# Altium PCB SlaveBoard_2020.PcbDoc (part 1 of 2)
Units mil, origin at the board's own origin, x right, y up, seen from the top; angles counter-clockwise.
Board outline 5905.51 x 3937.01 mil, 8 copper layers (Top Layer, SIG01, GND, SIG03, SIG04, PWR, SIG05, Bottom Layer), stack 60.424 mil thick; 102 components, 233 nets, 1118 pads, 683 vias.
Unrouted connection lines stored in the file: 111.
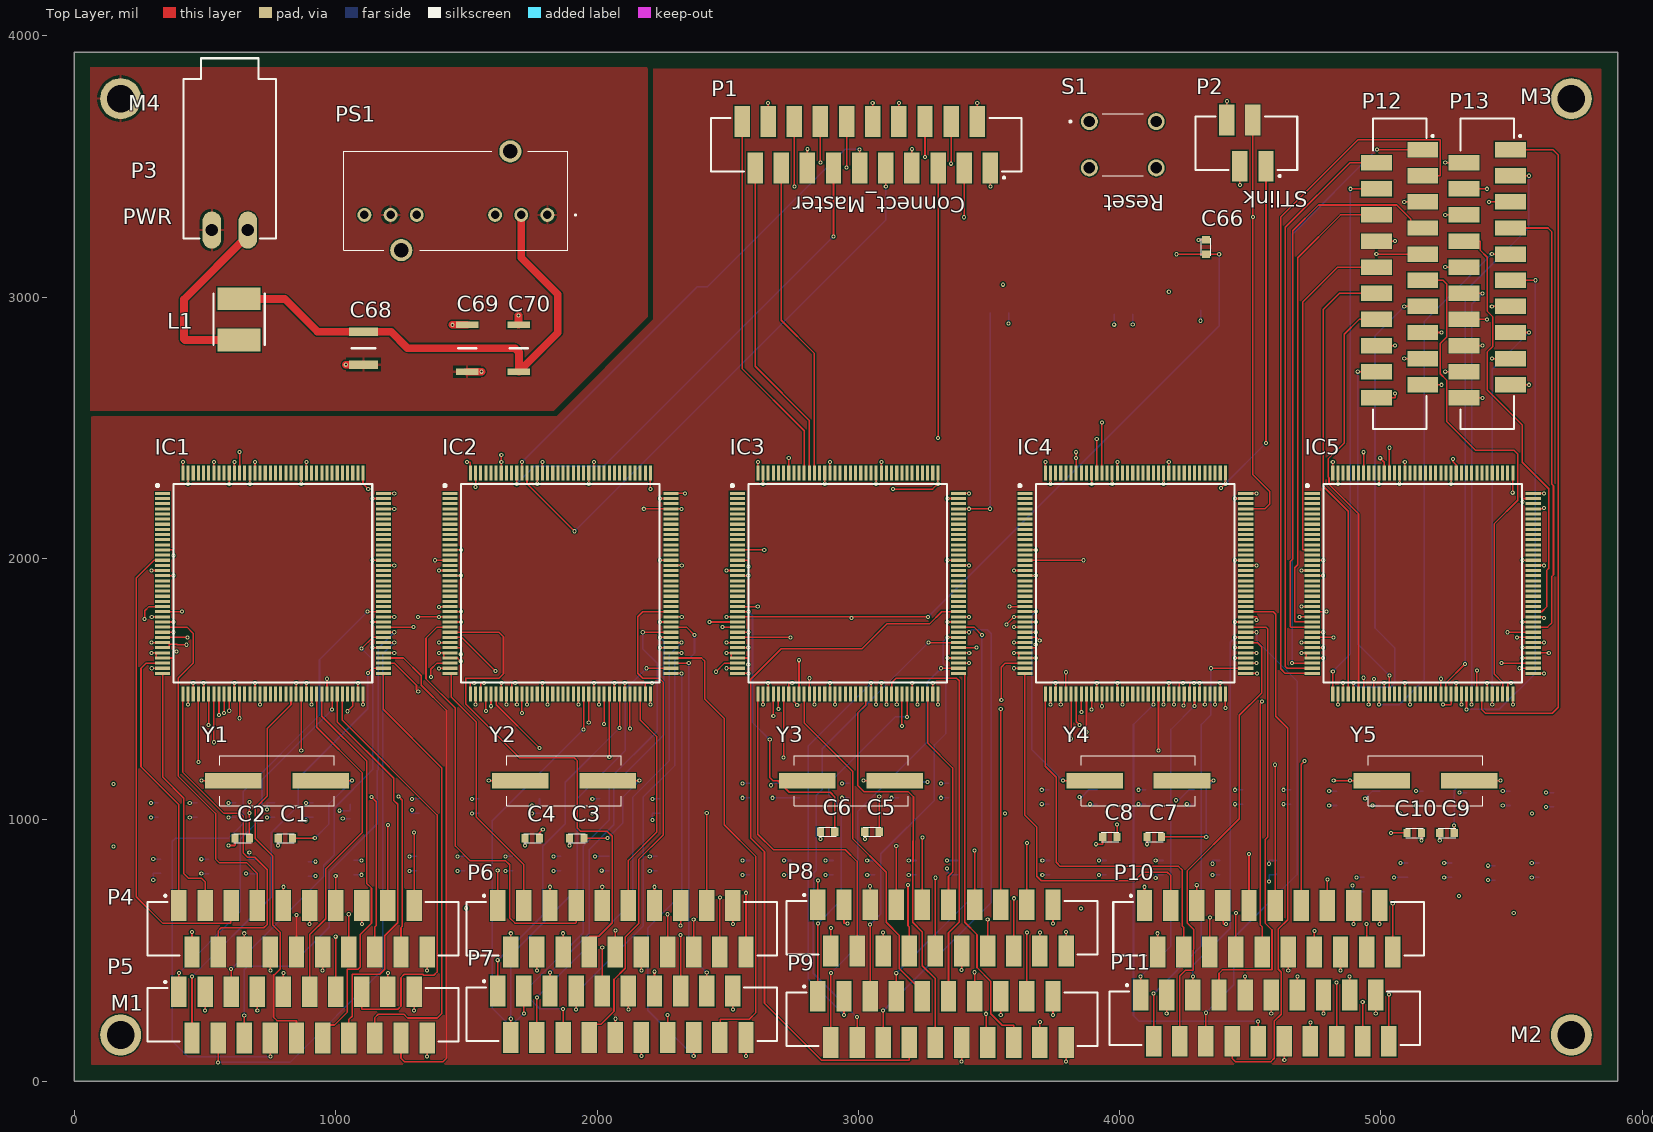
[diagram p0: Top Layer view]
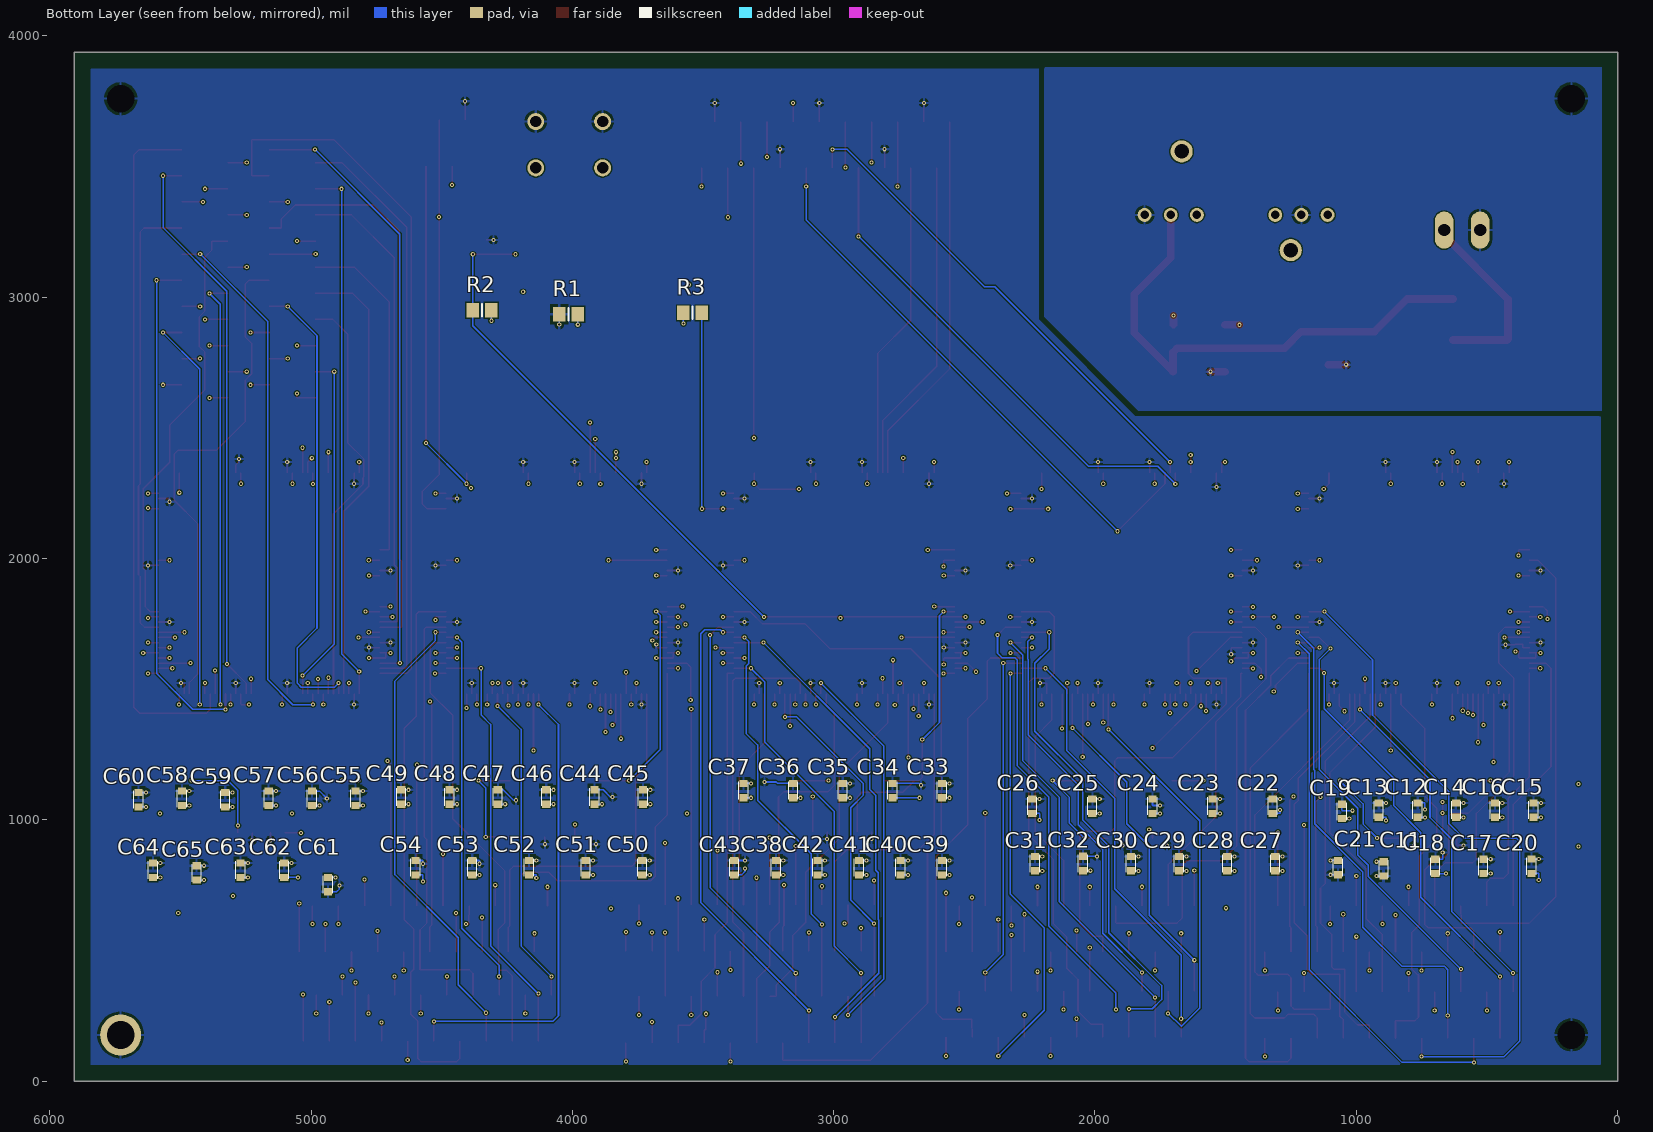
[diagram p1: Bottom Layer view, seen from below]
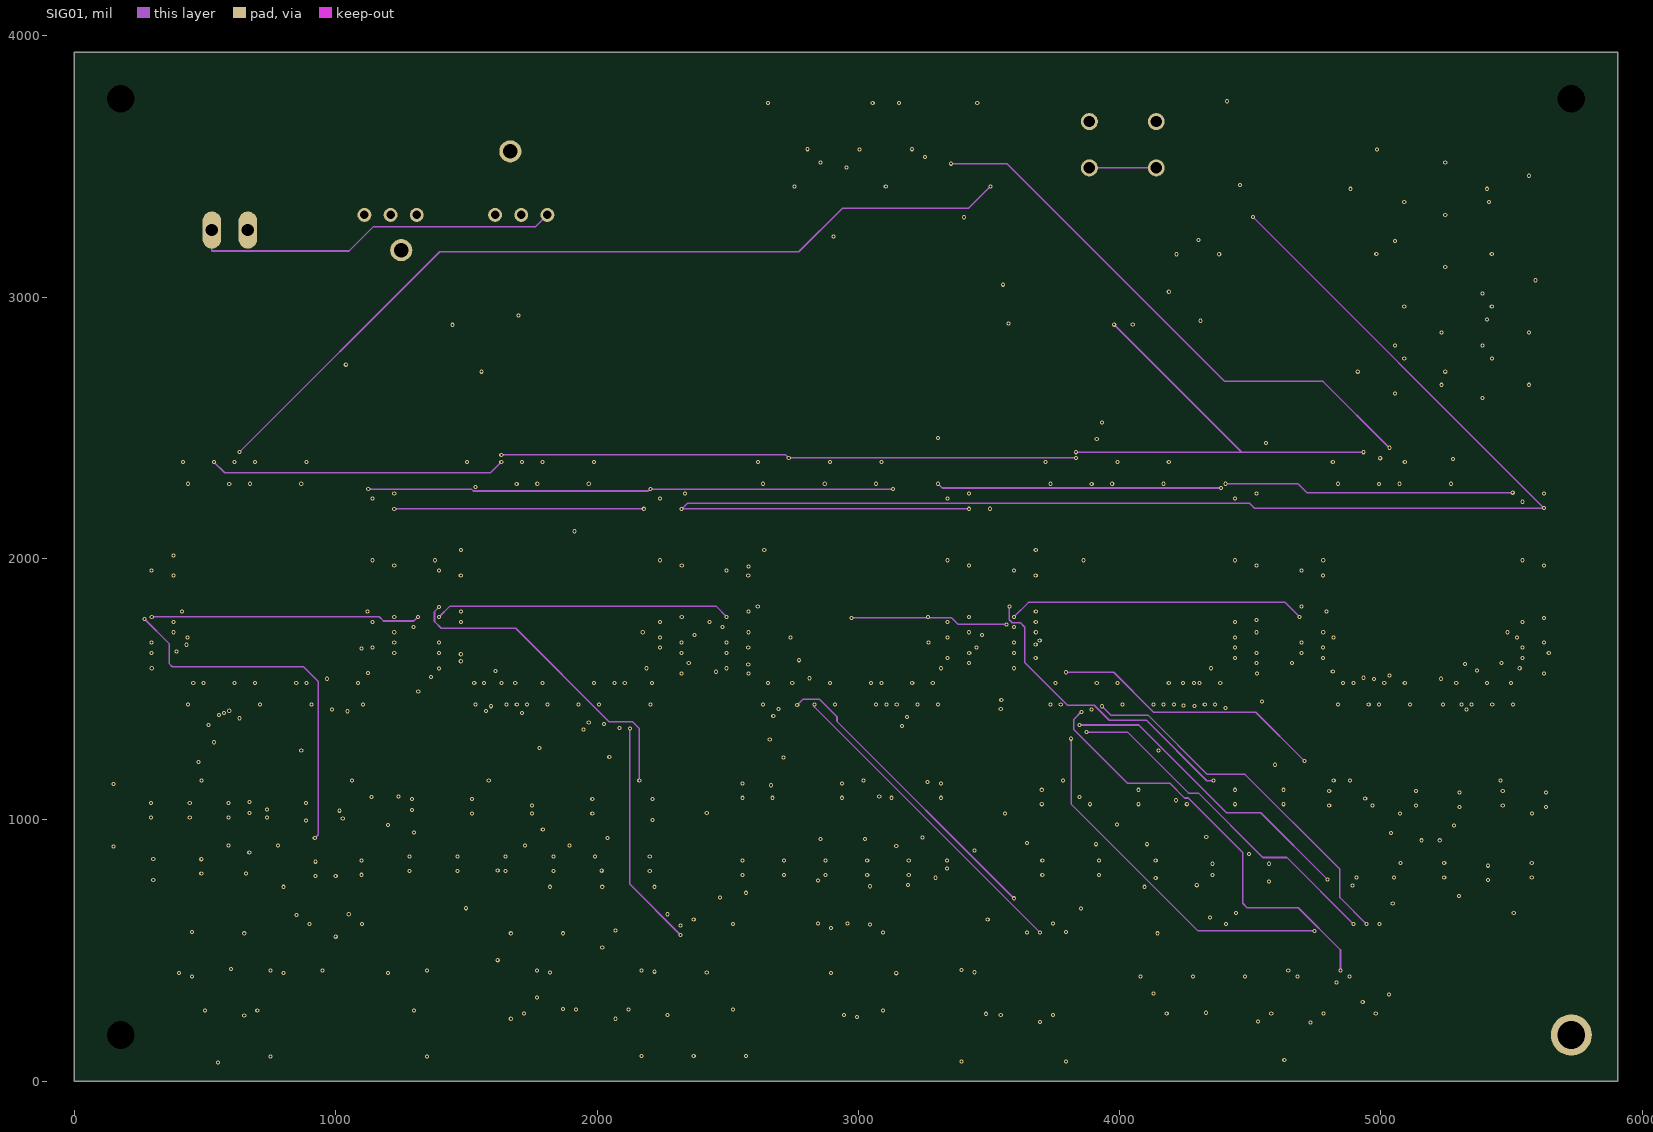
[diagram p2: SIG01]
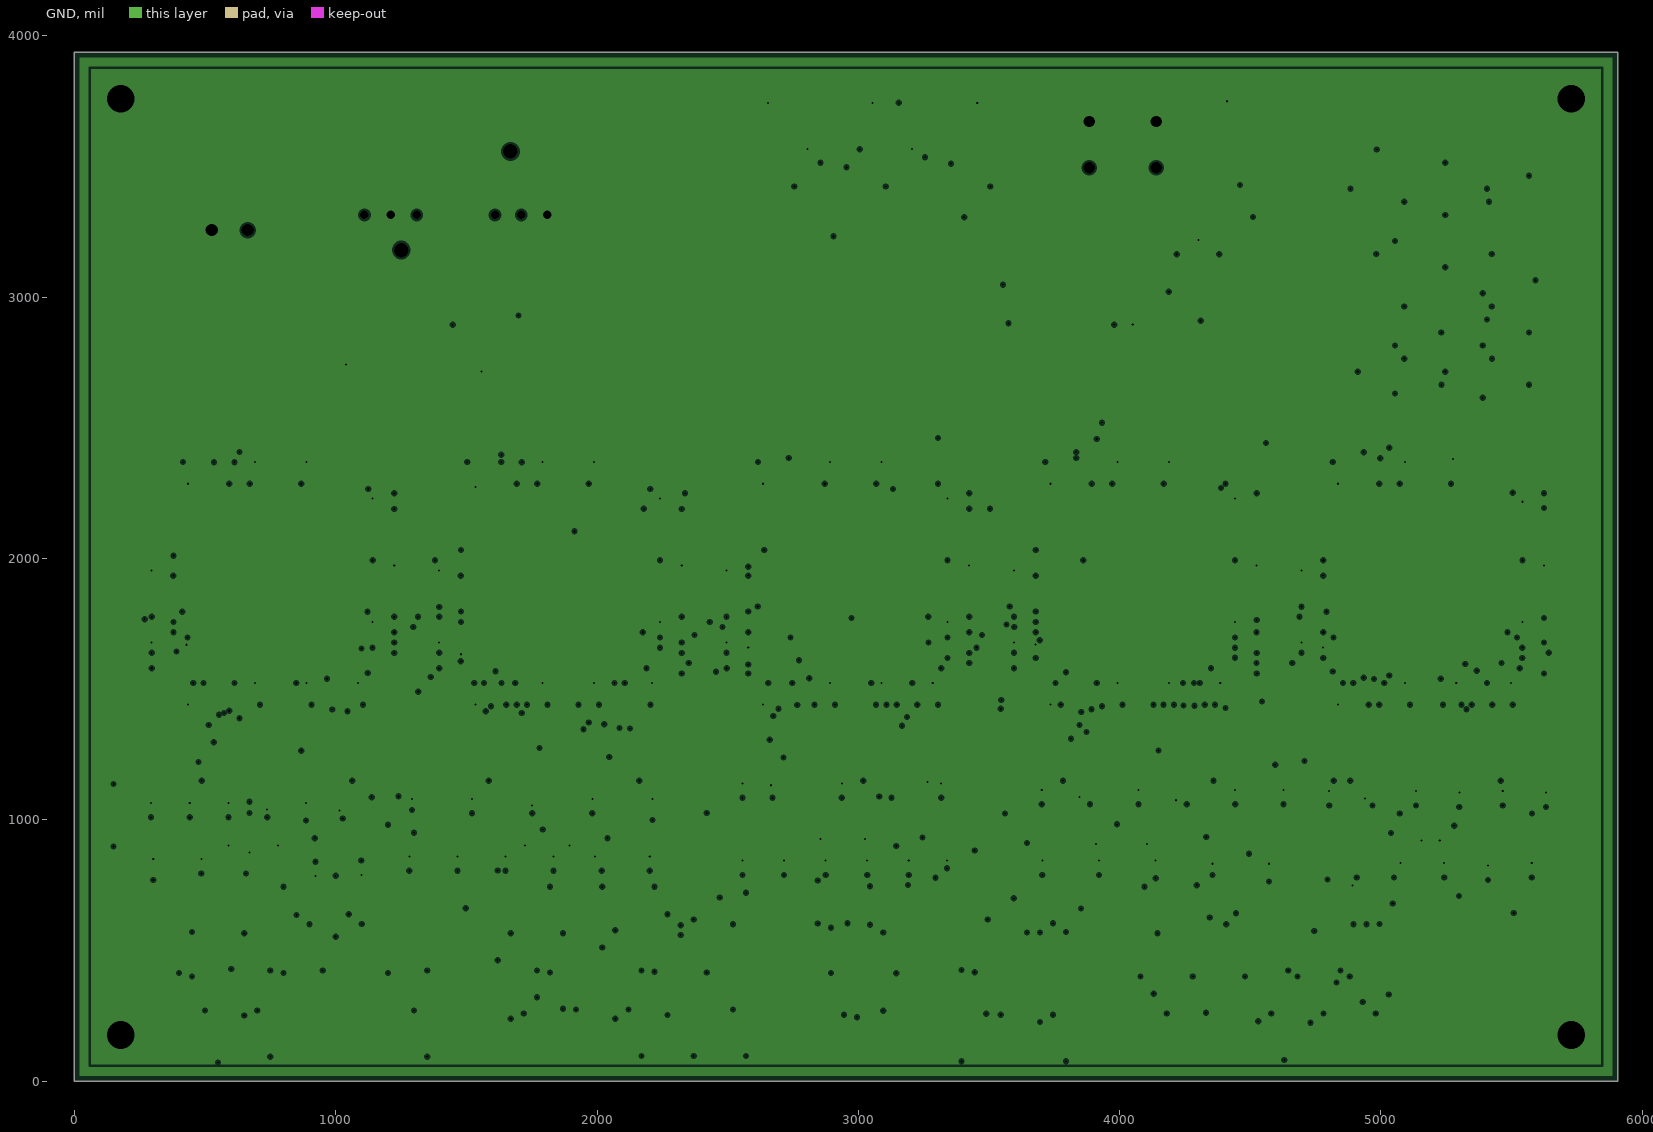
[diagram p3: GND, clearances drawn from the general rule]
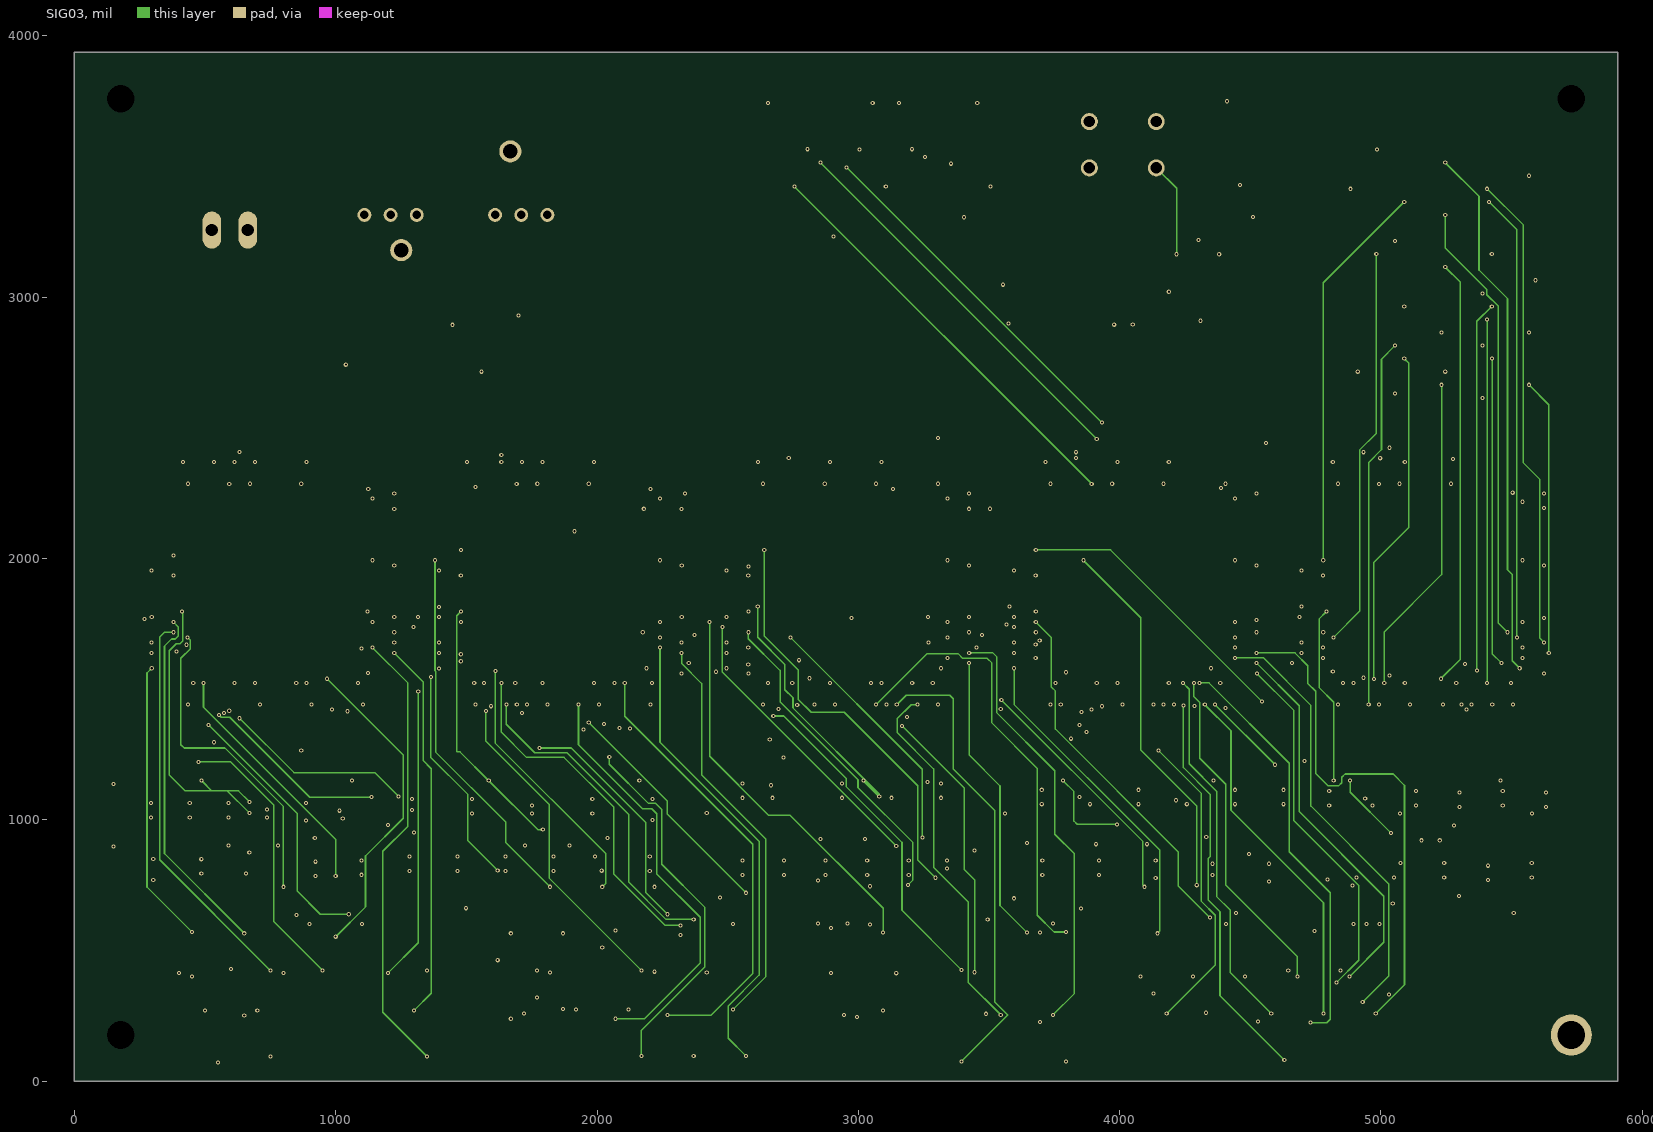
[diagram p4: SIG03]
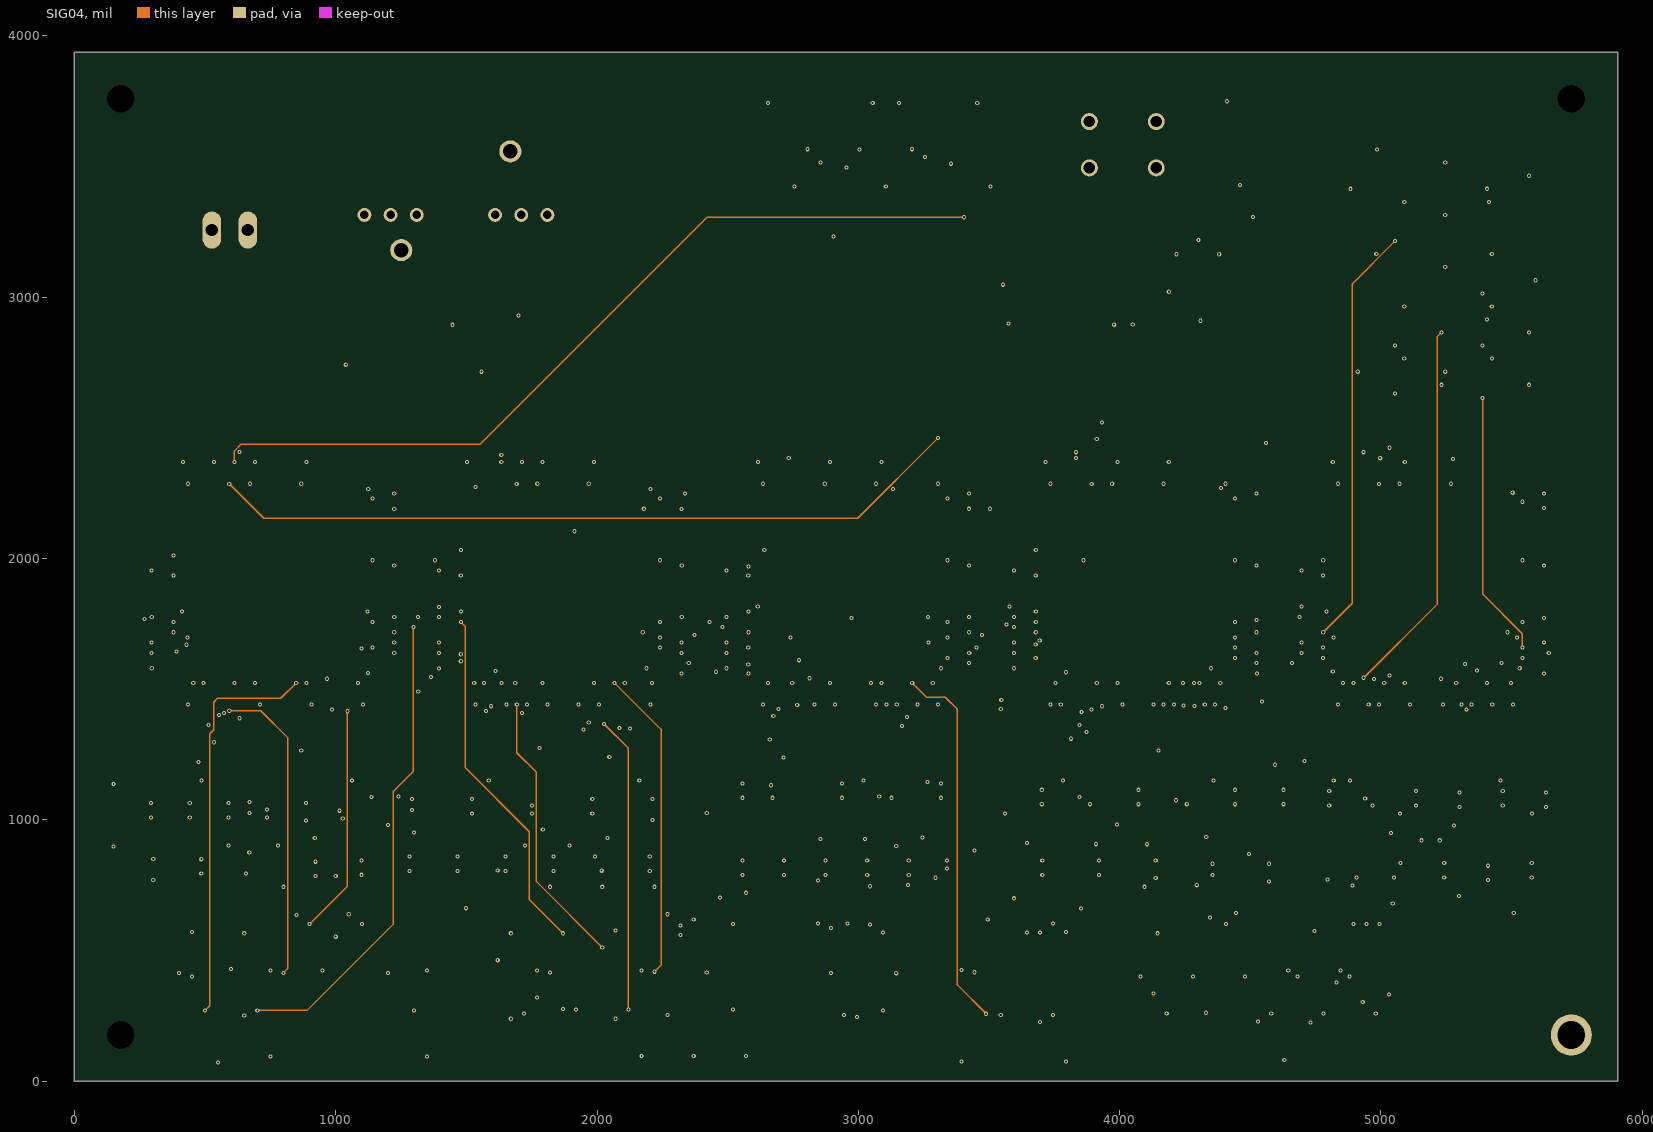
[diagram p5: SIG04]
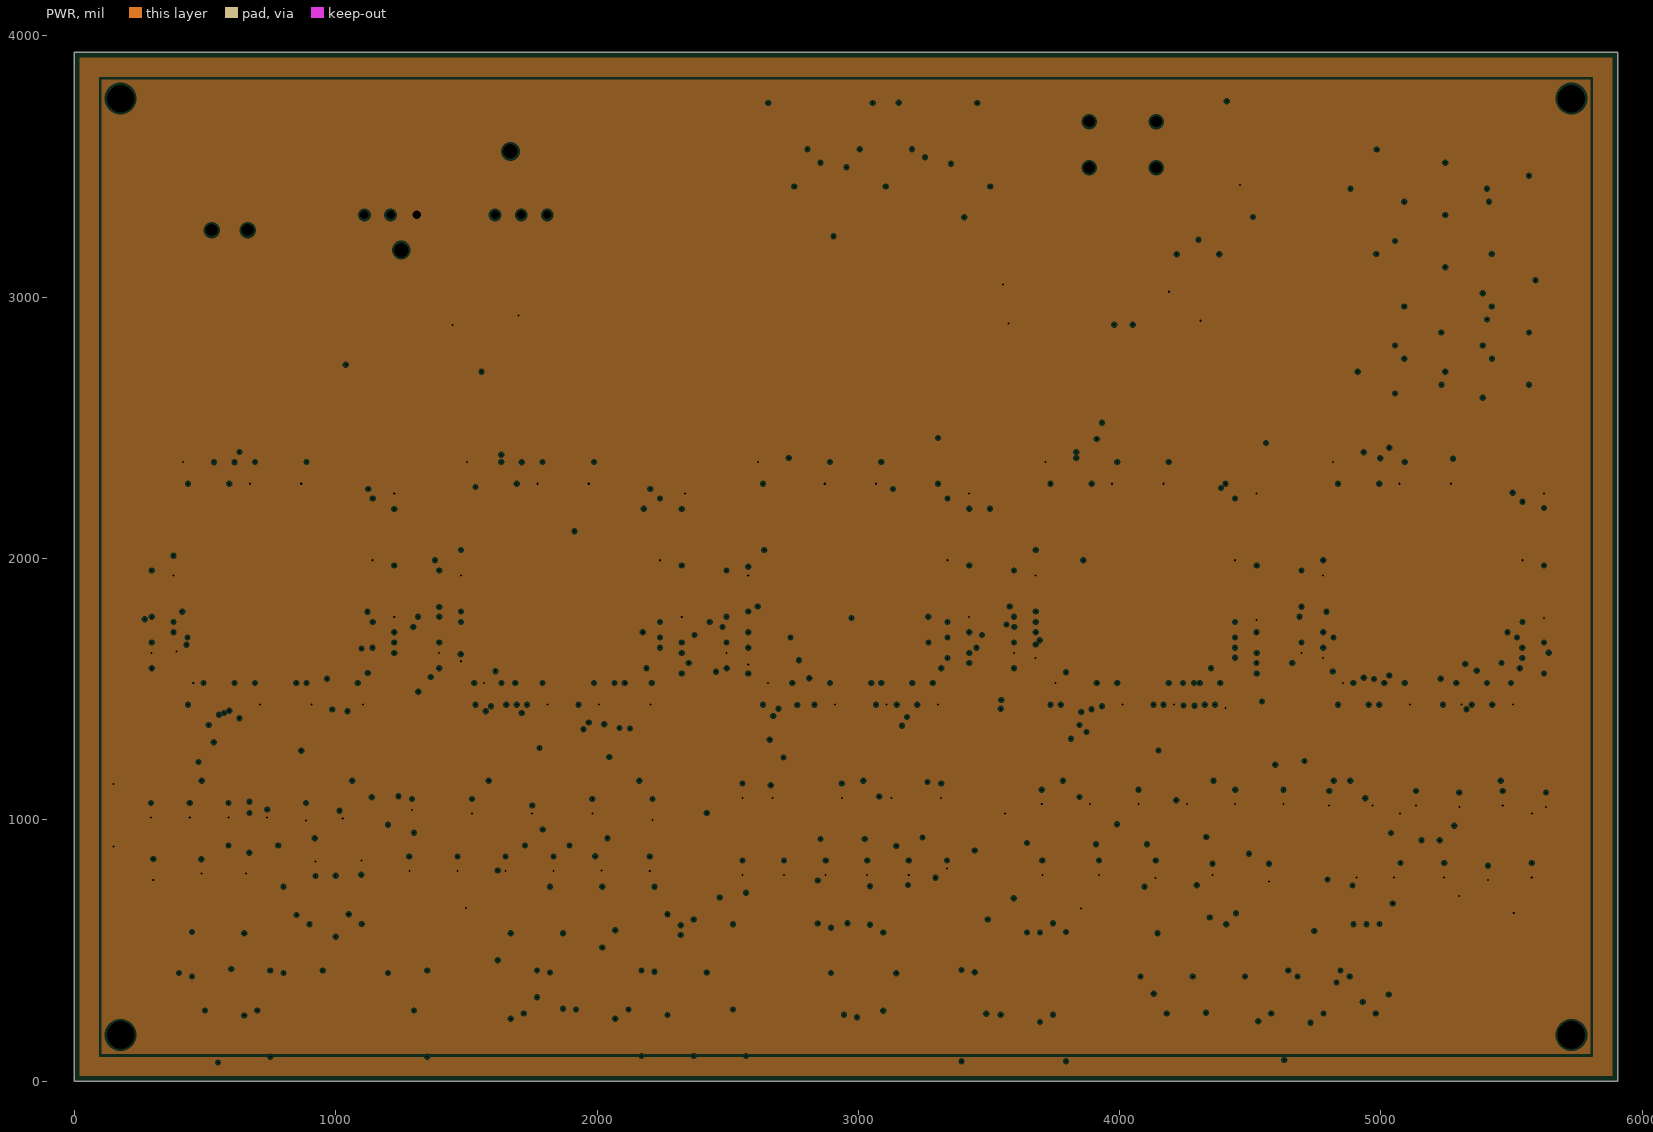
[diagram p6: PWR, clearances drawn from the general rule]
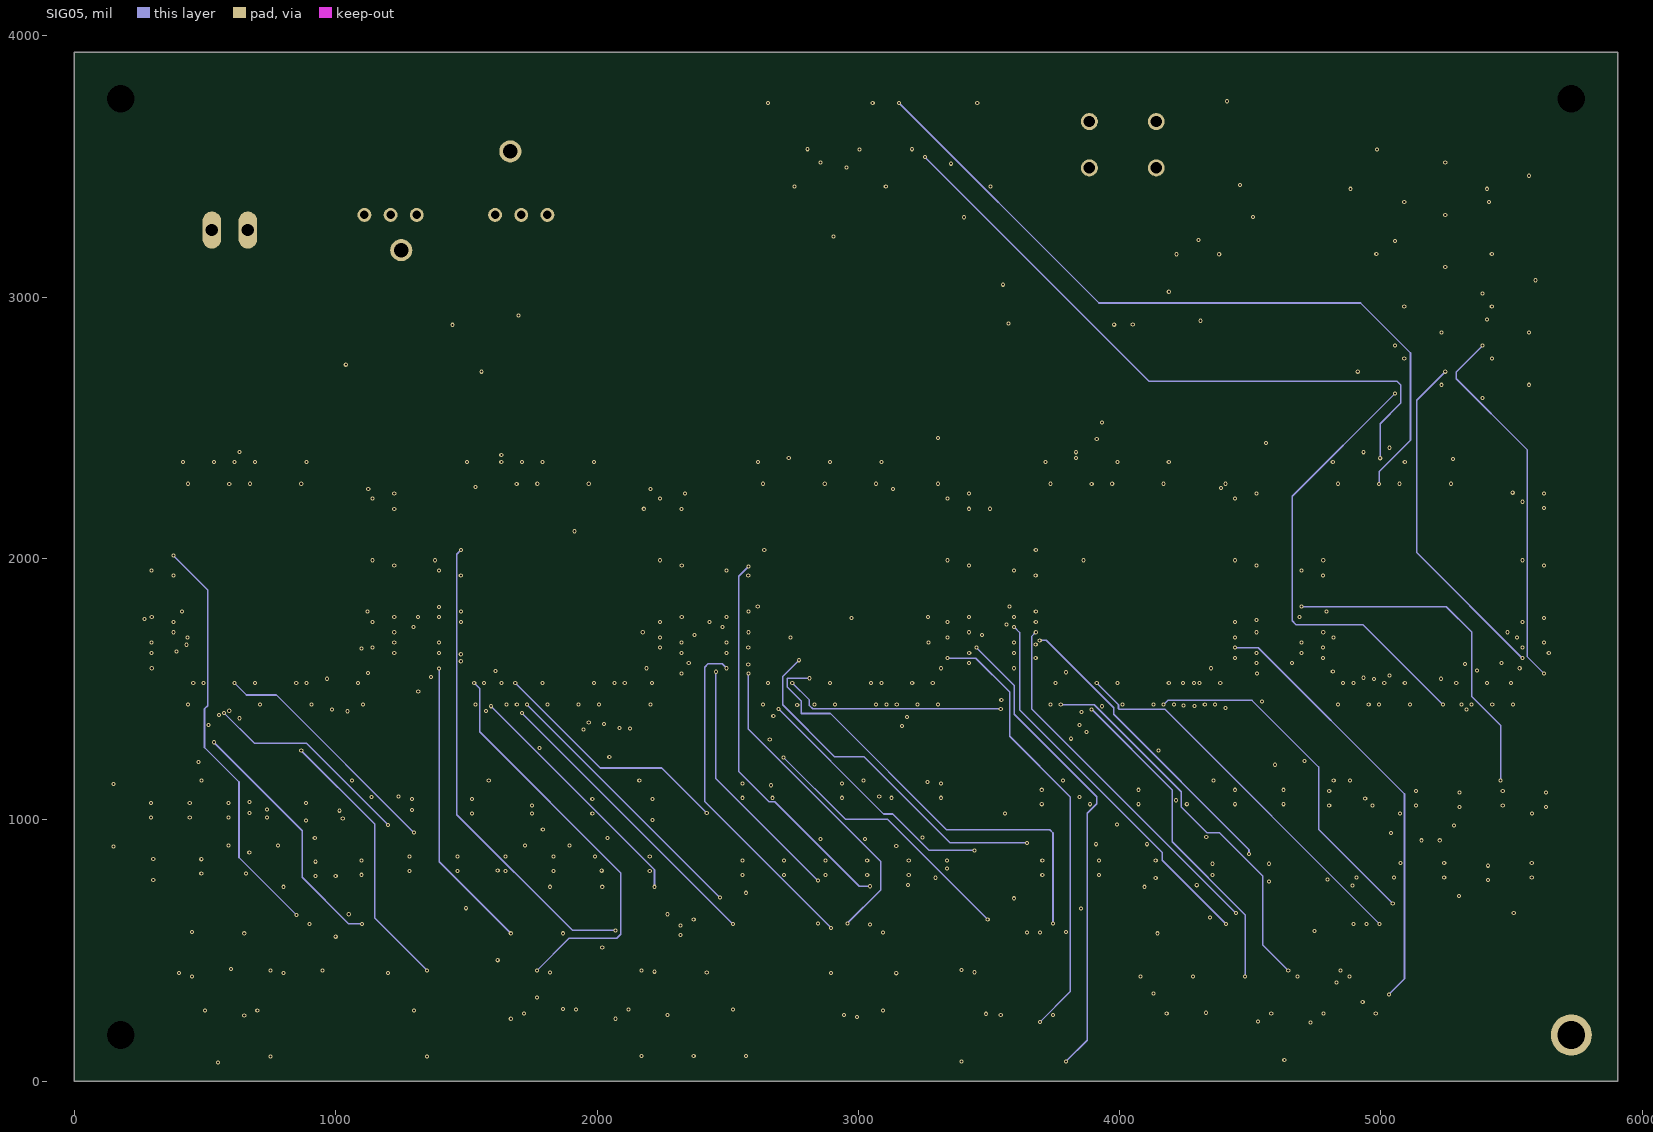
[diagram p7: SIG05]

## Layer stack, top to bottom
Top Solder: solder mask 1, SM-001, Dk 4
Top Layer: signal copper 1.378
Dielectric 1: prepreg 2.8, PP-006, Dk 4.1
Dielectric 2: prepreg 2.8, PP-006, Dk 4.1
SIG01: signal copper 1.378
Dielectric 3: core 9, Core-027, Dk 4.5
GND: plane copper 1.378, net GND
Dielectric 4: prepreg 2.8, PP-006, Dk 4.1
Dielectric 5: prepreg 2.8, PP-006, Dk 4.1
SIG03: signal copper 1.378
Dielectric 6: core 9, Core-027, Dk 4.5
SIG04: signal copper 1.378
Dielectric 7: prepreg 2.8, PP-006, Dk 4.1
Dielectric 8: prepreg 2.8, PP-006, Dk 4.1
PWR: plane copper 1.378, net 3.3V
Dielectric 9: core 9, Core-027, Dk 4.5
SIG05: signal copper 1.378
Dielectric 10: prepreg 2.8, PP-006, Dk 4.1
Dielectric 11: prepreg 2.8, PP-006, Dk 4.1
Bottom Layer: signal copper 1.378
Bottom Solder: solder mask 1, SM-001, Dk 4

## Board outline
0,0 0,3937.01 5905.51,3937.01 5905.51,0

## Design rules (kind name [scope] priority, off if disabled: settings)
Clearance [istrack>(InDifferentialPairClass('All Differential Pairs')) vs (IsTrack)] p1: gap=12 ignorepadtopadclearanceinfootprint=TRUE except(0: Arc-Hole Track-Hole SMDPad-Hole THPad-Hole Via-Hole Fill-Hole Poly-Hole Region-Hole Text-Hole)
Clearance All [All] p2: gap=4.5 ignorepadtopadclearanceinfootprint=TRUE except(0: Arc-Hole Track-Hole SMDPad-Hole THPad-Hole Via-Hole Fill-Hole Poly-Hole Region-Hole Text-Hole)
Clearance Via_Poly [IsVia vs inpoly] p3: gap=5 ignorepadtopadclearanceinfootprint=TRUE except(0: Arc-Hole Track-Hole SMDPad-Hole THPad-Hole Via-Hole Fill-Hole Poly-Hole Region-Hole Text-Hole)
Clearance Poly [Isvia vs (InPolygon)] p4: gap=10 ignorepadtopadclearanceinfootprint=TRUE except(0: Arc-Hole Track-Hole SMDPad-Hole THPad-Hole Via-Hole Fill-Hole Poly-Hole Region-Hole Text-Hole)
MinimumSolderMaskSliver [All] p1: minsoldermaskwidth=0
PlaneClearance [All] p1: clearance=8
PlaneConnect [All] p1: planeconnectstyle=Relief reliefexpansion=6 reliefentries=4 reliefconductorwidth=10 reliefairgap=8
PolygonConnect [All] p1: connectstyle=Relief reliefconductorwidth=10 reliefentries=4 polygonreliefangle="90 Angle" airgapwidth=10
PolygonConnect PolygonConnect_Via [IsVia] p2: connectstyle=Direct reliefconductorwidth=10 reliefentries=4 polygonreliefangle="90 Angle" airgapwidth=10
RoutingVias [All] p1: holewidth=7.87 width=15.75 viastyle="Through Hole" minholewidth=7.87 minwidth=15.75 maxholewidth=7.87 maxwidth=15.75
SilkToSilkClearance [All] p1: silktosilkclearance=0
SilkToSolderMaskClearance [IsPad] p1: minsilkscreentomaskgap=0 clearancetoexposedcopper=TRUE
SolderMaskExpansion [All] p1: expansion=4 istentingtop=FALSE
Width Diff_pair [(InDifferentialPairClass('100'))] p1: maxlimit=4.5 minlimit=4.5 preferedwidth=4.5
Width Width_1 [All] p2: maxlimit=60 minlimit=6 preferedwidth=6 minimp=50.000000 maximp=50.000000 favimp=50.000000
Width PWR [InNetClass('PWR')] p3: maxlimit=60 minlimit=10 preferedwidth=12
25 further rules are at their usual default settings.

## Components (designator, comment, footprint, x,y, rotation, side; value= is the part's Value field where it differs from the comment)
C1 "30pF" C0603 835,930 r180 top
C2 "30pF" C0603 670,930 r180 top
C3 "30pF" C0603 1950,930 r180 top
C4 "30pF" C0603 1780,930 r180 top
C5 "30pF" C0603 3080,955 r180 top
C6 "30pF" C0603 2910,955 r180 top
C7 "30pF" C0603 4160,935 r180 top
C8 "30pF" C0603 3990,935 r180 top
C9 "30pF" C0603 5280,950 r180 top
C10 "30pF" C0603 5100,950 r0 top
C11 "100nF" C0603 895,840 r270 bottom
C12 "100nF" C0603 765.91,1009.82 r90 bottom
C13 "100nF" C0603 914.03,1009.82 r90 bottom
C14 "100nF" C0603 617.79,1009.82 r90 bottom
C15 "100nF" C0603 321.56,1009.82 r90 bottom
C16 "100nF" C0603 469.68,1009.82 r90 bottom
C17 "100nF" C0603 513.75,794.46 r90 bottom
C18 "100nF" C0603 697.5,794.46 r90 bottom
C19 "100nF" C0603 1055,1005 r90 bottom
C20 "100nF" C0603 330,795 r90 bottom
C21 "100nF" C0603 1070,845 r270 bottom
C22 "100nF" C0603 1320,1025 r90 bottom
C23 "100nF" C0603 1550,1025 r90 bottom
C24 "100nF" C0603 1780,1025 r90 bottom
C25 "100nF" C0603 2010,1025 r90 bottom
C26 "100nF" C0603 2240,1025 r90 bottom
C27 "100nF" C0603 1310,805 r90 bottom
C28 "100nF" C0603 1494,805 r90 bottom
C29 "100nF" C0603 1678,805 r90 bottom
C30 "100nF" C0603 1862,805 r90 bottom
C31 "100nF" C0603 2230,805 r90 bottom
C32 "100nF" C0603 2046,805.47 r90 bottom
C33 "100nF" C0603 2585,1084.53 r90 bottom
C34 "100nF" C0603 2775,1084.53 r90 bottom
C35 "100nF" C0603 2965,1084.53 r90 bottom
C36 "100nF" C0603 3155,1084.53 r90 bottom
C37 "100nF" C0603 3345,1084.53 r90 bottom
C38 "100nF" C0603 3221,789.53 r90 bottom
C39 "100nF" C0603 2585,789.53 r90 bottom
C40 "100nF" C0603 2744,789.53 r90 bottom
C41 "100nF" C0603 2903,789.53 r90 bottom
C42 "100nF" C0603 3062,789.53 r90 bottom
C43 "100nF" C0603 3380,789.53 r90 bottom
C44 "100nF" C0603 3915,1060 r90 bottom
C45 "100nF" C0603 3730,1060 r90 bottom
C46 "100nF" C0603 4100,1060 r90 bottom
C47 "100nF" C0603 4285,1060 r90 bottom
C48 "100nF" C0603 4470,1060 r90 bottom
C49 "100nF" C0603 4655,1060 r90 bottom
C50 "100nF" C0603 3732,789.53 r90 bottom
C51 "100nF" C0603 3949,789.53 r90 bottom
C52 "100nF" C0603 4166,789.53 r90 bottom
C53 "100nF" C0603 4383,789.53 r90 bottom
C54 "100nF" C0603 4600,789.53 r90 bottom
C55 "100nF" C0603 4830,1055 r90 bottom
C56 "100nF" C0603 4996,1055 r90 bottom
C57 "100nF" C0603 5162,1055 r90 bottom
C58 "100nF" C0603 5494,1055 r90 bottom
C59 "100nF" C0603 5328,1049.53 r90 bottom
C60 "100nF" C0603 5660,1049.53 r90 bottom
C61 "100nF" C0603 4935,780 r270 bottom
C62 "100nF" C0603 5102.5,780 r90 bottom
C63 "100nF" C0603 5270,780 r90 bottom
C64 "100nF" C0603 5605,780 r90 bottom
C65 "100nF" C0603 5437.5,769.53 r90 bottom
C66 "100nF" C0603 4330,3164.53 r90 top
C68 "10uF" C1210 1106.56,2804.82 r90 top
C69 "1nF" C1808 1502.8,2804.82 r90 top
C70 "1nF" C1808 1700.91,2804.82 r90 top
IC1 "STM32F303ZET6" f303QFP50P2200X2200X160-144N 760,1905 r0 top
IC2 "STM32F303ZET6" f303QFP50P2200X2200X160-144N 1860,1905 r0 top
IC3 "STM32F303ZET6" f303QFP50P2200X2200X160-144N 2960,1905 r0 top
IC4 "STM32F303ZET6" f303QFP50P2200X2200X160-144N 4060,1905 r0 top
IC5 "STM32F303ZET6" f303QFP50P2200X2200X160-144N 5160,1905 r0 top
L1 "Inductor" L1_74404054220 630,2915 r90 top value=22uH
M1 "HOLE2R7-4" HOLE2R7-4#1 185,190 r0 top
M2 "HOLE2R7-4" HOLE2R7-4#2 5700,215 r0 top
M3 "HOLE2R7-4" HOLE2R7-4#3 5605,3625 r0 top
M4 "HOLE2R7-4" HOLE2R7-4#4 280,3600 r0 top
P1 "MHDR2X10" conn20pin 3030,3583.58 r0 top
P2 "MHDR1X4" Conn4pin 4485,3590 r0 top
P3 "MHDR1X2" ConnPWR 595,3570 r90 top
P4 "MHDR1X20" conn20pin 875,583.58 r180 top
P5 "MHDR1X20" conn20pin 875,253.58 r180 top
P6 "MHDR1X20" conn20pin 2095,583.58 r180 top
P7 "MHDR1X20" conn20pin 2095,256.42 r180 top
P8 "MHDR1X20" conn20pin 3320,586.42 r180 top
P9 "MHDR1X20" conn20pin 3320,236.42 r180 top
P10 "MHDR1X20" conn20pin 4570,583.58 r180 top
P11 "MHDR1X20" conn20pin 4555,241.42 r180 top
P12 "MHDR1X20" conn20pin 5071.42,3090 r90 top
P13 "MHDR1X20" conn20pin 5406.42,3090 r90 top
PS1 "TMR 6-2410WIR" TMR62410WIR 1810,3315 r180 top
R1 "10K" 6-0805_N 4014.57,2935 r180 bottom value=100K
R2 "10K" 6-0805_N 4345.43,2950 r180 bottom
R3 "10k" 6-0805_N 3539.57,2940 r180 bottom
S1 "B3F-1025" B3F1025 3884.09,3672.17 r180 top
Y1 "ATS08ASM-1E" ATS040SM1 775,1150 r180 top
Y2 "ATS08ASM-1E" ATS040SM1 1873.75,1150 r180 top
Y3 "ATS08ASM-1E" ATS040SM1 2972.5,1150 r180 top
Y4 "ATS08ASM-1E" ATS040SM1 4071.25,1150 r180 top
Y5 "ATS08ASM-1E" ATS040SM1 5170,1150 r180 top

## Footprints (in the part's own frame and the unit in brackets; to place one, negate y for a bottom-side part, rotate by r counter-clockwise, add the part's x,y. Pads: shape width x height; smd on the part's side, far side on the other; paste and mask are expansions set on the pad)
6-0805_N [mm] "Chip Resistor, Body 2.0x1.2mm, IPC Medium Density"
  rect 1.2x1.4 smd mask+0.102: 1(-0.9,0) 2(0.9,0)
  silkscreen extent 0,-0.6 0,0.6, body extent -1.07,-0.7 1.07,0.7, height 0.7
ATS040SM1 [mm]
  rect 5.5x1.5 smd mask+0.102: 1(-4.25,0) 2(4.25,0)
  silkscreen extent -5.55,-2.41 5.55,2.41, body extent -6.85,-2.41 6.85,2.41, height 4.4
B3F1025 [mm]
  round 1.65 hole 1.1 mask+0.102: 1(0,0) 2(-6.5,0) 3(0,4.5) 4(-6.5,4.5)
  silkscreen extent -5.25,-0.75 1.95,5.25, body extent -6.95,-0.75 0.45,5.25, height 5.3
C0603 [mm]
  rect 0.7x0.8 smd paste+0 mask+0.1: 1(0,0) 2(1.4,0)
  silkscreen extent -0.15,-0.45 1.55,0.45, body extent -0.15,-0.45 1.55,0.45, height 0.53
C1210 [mm]
  rect 0.81x2.82 smd: 1(-1.6,0) 2(1.6,0)
  silkscreen extent 0,-1.15 0,1.15, body extent -1.4,-1.22 1.4,1.22, height 1.98
C1808 [mm]
  rect 0.67x2.18 smd: 1(-2.28,0) 2(2.28,0)
  silkscreen extent 0,-0.9 0,0.9, body extent -2.27,-1 2.27,1, height 1.3
Conn4pin [mm]
  rect 1.5x3 smd: 1(1.905,-2.25) 2(0.635,2.25) 3(-0.635,-2.25) 4(-1.905,2.25)
  silkscreen extent -4.94,-3.3 4.94,2.6
conn20pin [mm]
  rect 1.5x3 smd: 1(12.065,-2.25) 2(10.795,2.25) 3(9.525,-2.25) 4(8.255,2.25) 5(6.985,-2.25) 6(5.715,2.25) 7(4.445,-2.25) 8(3.175,2.25) 9(1.905,-2.25) 10(0.635,2.25) 11(-0.635,-2.25) 12(-1.905,2.25) 13(-3.175,-2.25) 14(-4.445,2.25) 15(-5.715,-2.25) 16(-6.985,2.25) 17(-8.255,-2.25) 18(-9.525,2.25) 19(-10.795,-2.25) 20(-12.065,2.25)
  silkscreen extent -15.1,-3.3 15.1,2.6
ConnPWR [mm]
  oval 3.6x1.8 hole 1.2: 1(-7.95,-1.75) 2(-7.95,1.75)
  silkscreen extent -8.75,-4.5 8.75,4.5
f303QFP50P2200X2200X160-144N [mm]
  rect 1.475x0.3 smd mask+0.102: 1(-10.738,8.75) 2(-10.738,8.25) 3(-10.738,7.75) 4(-10.738,7.25) 5(-10.738,6.75) 6(-10.738,6.25) 7(-10.738,5.75) 8(-10.738,5.25) 9(-10.738,4.75) 10(-10.738,4.25) 11(-10.738,3.75) 12(-10.738,3.25) 13(-10.738,2.75) 14(-10.738,2.25) 15(-10.738,1.75) 16(-10.738,1.25) 17(-10.738,0.75) 18(-10.738,0.25) 19(-10.738,-0.25) 20(-10.738,-0.75) 21(-10.738,-1.25) 22(-10.738,-1.75) 23(-10.738,-2.25) 24(-10.738,-2.75) 25(-10.738,-3.25) 26(-10.738,-3.75) 27(-10.738,-4.25) 28(-10.738,-4.75) 29(-10.738,-5.25) 30(-10.738,-5.75) 31(-10.738,-6.25) 32(-10.738,-6.75) 33(-10.738,-7.25) 34(-10.738,-7.75) 35(-10.738,-8.25) 36(-10.738,-8.75) 73(10.738,-8.75) 74(10.738,-8.25) 75(10.738,-7.75) 76(10.738,-7.25) 77(10.738,-6.75) 78(10.738,-6.25) 79(10.738,-5.75) 80(10.738,-5.25) 81(10.738,-4.75) 82(10.738,-4.25) 83(10.738,-3.75) 84(10.738,-3.25) 85(10.738,-2.75) 86(10.738,-2.25) 87(10.738,-1.75) 88(10.738,-1.25) 89(10.738,-0.75) 90(10.738,-0.25) 91(10.738,0.25) 92(10.738,0.75) 93(10.738,1.25) 94(10.738,1.75) 95(10.738,2.25) 96(10.738,2.75) 97(10.738,3.25) 98(10.738,3.75) 99(10.738,4.25) 100(10.738,4.75) 101(10.738,5.25) 102(10.738,5.75) 103(10.738,6.25) 104(10.738,6.75) 105(10.738,7.25) 106(10.738,7.75) 107(10.738,8.25) 108(10.738,8.75)
  rect 0.3x1.475 smd mask+0.102: 37(-8.75,-10.738) 38(-8.25,-10.738) 39(-7.75,-10.738) 40(-7.25,-10.738) 41(-6.75,-10.738) 42(-6.25,-10.738) 43(-5.75,-10.738) 44(-5.25,-10.738) 45(-4.75,-10.738) 46(-4.25,-10.738) 47(-3.75,-10.738) 48(-3.25,-10.738) 49(-2.75,-10.738) 50(-2.25,-10.738) 51(-1.75,-10.738) 52(-1.25,-10.738) 53(-0.75,-10.738) 54(-0.25,-10.738) 55(0.25,-10.738) 56(0.75,-10.738) 57(1.25,-10.738) 58(1.75,-10.738) 59(2.25,-10.738) 60(2.75,-10.738) 61(3.25,-10.738) 62(3.75,-10.738) 63(4.25,-10.738) 64(4.75,-10.738) 65(5.25,-10.738) 66(5.75,-10.738) 67(6.25,-10.738) 68(6.75,-10.738) 69(7.25,-10.738) 70(7.75,-10.738) 71(8.25,-10.738) 72(8.75,-10.738) 109(8.75,10.738) 110(8.25,10.738) 111(7.75,10.738) 112(7.25,10.738) 113(6.75,10.738) 114(6.25,10.738) 115(5.75,10.738) 116(5.25,10.738) 117(4.75,10.738) 118(4.25,10.738) 119(3.75,10.738) 120(3.25,10.738) 121(2.75,10.738) 122(2.25,10.738) 123(1.75,10.738) 124(1.25,10.738) 125(0.75,10.738) 126(0.25,10.738) 127(-0.25,10.738) 128(-0.75,10.738) 129(-1.25,10.738) 130(-1.75,10.738) 131(-2.25,10.738) 132(-2.75,10.738) 133(-3.25,10.738) 134(-3.75,10.738) 135(-4.25,10.738) 136(-4.75,10.738) 137(-5.25,10.738) 138(-5.75,10.738) 139(-6.25,10.738) 140(-6.75,10.738) 141(-7.25,10.738) 142(-7.75,10.738) 143(-8.25,10.738) 144(-8.75,10.738)
  silkscreen extent -11.35,-9.65 9.65,9.65, body extent -11,-11 11,11, height 1.6
HOLE2R7-4#1 [mm] "HOLE2R7-4"
  round 4 / inner round 1.524 / far side round 1.524 hole 2.7 mask+0.102: 1(-0.199,-0.326)
HOLE2R7-4#2 [mm] "HOLE2R7-4"
  round 4 hole 2.7 mask+0.102: 1(0.72,-0.961)
HOLE2R7-4#3 [mm] "HOLE2R7-4"
  round 4 / inner round 1.524 / far side round 1.524 hole 2.7 mask+0.102: 1(3.133,3.425)
HOLE2R7-4#4 [mm] "HOLE2R7-4"
  round 4 / inner round 1.524 / far side round 1.524 hole 2.7 mask+0.102: 1(-2.612,4.06)
L1_74404054220 [mm]
  rect 2.2x4.2 smd: 1(-2,0) 2(2,0)
  silkscreen extent -2.5,-2.5 2.5,2.5, body extent -2.5,-2.5 2.5,2.5, height 4
TMR62410WIR [mm]
  round 1.349 hole 0.83 mask+0.102: 1(0,0) 2(2.54,0) 3(5.08,0) 6(12.7,0) 7(15.24,0) 8(17.78,0)
  round 2.145 hole 1.43 mask+0.102: 9(3.6,-6.175) 10(14.2,3.425)
  silkscreen extent -2.8,-6.17 19.8,3.42, body extent -2.12,-5.95 19.72,3.75, height 14.7

## Part data
C1 C2 C3 C4 C5 C6 C7 C8 C9 C10: library part CP1
C11 C12 C13 C14 C15 C16 C17 C18 C19 C20 C21 C22 C23 C24 C25 C26 C27 C28 C29 C30 C31 C32 C33 C34 C35 C36 C37 C38 C39 C40 C41 C42 C43 C44 C45 C46 C47 C48 C49 C50 C51 C52 C53 C54 C55 C56 C57 C58 C59 C60 C61 C62 C63 C64 C65: library part Cap_0805
C66 C68 C69 C70: library part C
P1: "Header, 10-Pin, Dual row", LatestRevisionDate=17-Jul-2002, LatestRevisionNote="Re-released for DXP Platform.", Publisher="Altium Limited"
P2: "Header, 4-Pin", LatestRevisionDate=17-Jul-2002, LatestRevisionNote="Re-released for DXP Platform.", Publisher="Altium Limited"
P3: "Header, 2-Pin", LatestRevisionDate=17-Jul-2002, LatestRevisionNote="Re-released for DXP Platform.", Publisher="Altium Limited"
P4 P5 P6 P7 P8 P9 P10 P11 P12 P13: "Header, 20-Pin", LatestRevisionDate=17-Jul-2002, LatestRevisionNote="Re-released for DXP Platform.", Publisher="Altium Limited"
PS1: "DCDC Wandler"
R1 R2 R3: library part R
S1: "Switch", Manufacturer_Name="Omron Electronics", Mouser Part Number=653-B3F-1025, Datasheet Link=http://uk.rs-online.com/web/p/products/6821140, Height=5.2mm, Manufacturer_Part_Number=B3F-1025, Mouser Price/Stock=https://www.mouser.co.uk/ProductDetail/Omron-Electronics/B3F-1025?qs=1tDaWCEHQQ7ZoQQuZXPfLw%3D%3D
Y1 Y2 Y3 Y4 Y5: "Crystal or Oscillator", Manufacturer_Name=CTS, Mouser Part Number=774-ATS08ASM-1E, Arrow Part Number=ATS08ASM-1E, Arrow Price/Stock=https://www.arrow.com/en/products/ats08asm-1e/cts, Datasheet Link=https://www.ctscorp.com/wp-content/uploads/ATS-ATSSM.pdf, Height=4.3mm, Manufacturer_Part_Number=ATS08ASM-1E, Mouser Price/Stock=https://www.mouser.co.uk/ProductDetail/CTS-Electronic-Components/ATS08ASM-1E/?qs=tjlMjqRIEYSoOC%2FyJ4%2Frjw%3D%3D
L1: SimulationGenericComponent=True

## Via types
v1: diameter 15.75, hole 7.87, Top Layer to Bottom Layer, tented both sides, 670 vias
v2: diameter 15.75, hole 7.87, Top Layer to Bottom Layer, 13 vias

## Nets (pads, with @x,y where several pads share a name; then routed paths per layer and width w, separated by ;. In a path a pad name is that pad's centre, name@x,y a point inside that pad or via, vN(x,y) a via of type N, cw(c..) or ccw(c..) an arc to the next point about the centre after c; other vN are vias at no path point)
1_AD1_IN1: IC1.34 P4.1 | length 1058.3
  Top Layer w6: IC1.34@337.24,1599.88 275,1599.88 255,1579.88 255,1203 400,1058 P4.1@400,672.17
1_AD1_IN2: IC1.35 P4.2 | length 1205.1
  Top Layer w6: v1(296,1580.2) IC1.35@337.24,1580.2 ; P4.2@450,495 v1(450,571)
  SIG03 w6: v1(296,1580.2) 278,1562.2 278,743 v1(450,571)
1_AD1_IN3: IC1.36 P4.3 | length 985.5
  Top Layer w6: IC1.36@337.24,1560.51 338,1560.51 338,1164.16 419,1083.16 419,794.5 437.5,776 487.5,776 500,763.5 P4.3@500,672.17
1_AD1_IN4: IC1.37 P4.4 | length 1346.9
  Top Layer w6: IC1.37@415.51,1482.24 415.51,1181.49 571,1026 633.5,1026 647,1012.5 647,872.5 662.5,857 690.5,857 738,809.5 738,600 725,587 562.5,587 550,574.5 P4.4@550,495
1_AD1_IN5: IC1.14 P4.5 | length 1819.5
  Top Layer w6: IC1.14@337.24,1993.58 304.58,1993.58 237,1926 237,705.5 337.5,605 599,605 P4.5@600,672.17
1_AD1_IN6: IC1.26 P4.6 | length 1467.6
  Top Layer w6: IC1.26@337.24,1757.36 v1(379,1757.36) ; P4.6@650,495 v1(650,566)
  SIG03 w6: v1(379,1757.36) 397,1739.36 397,1703 386.06,1692.06 372.12,1692.06 345,1664.94 345,871 v1(650,566)
1_AD1_IN7: IC1.27 P4.7 | length 1380.6
  Top Layer w6: IC1.27@337.24,1737.68 431.38,1737.68 455.37,1713.68 455.37,1600.37 397,1542 397,1168 540.35,1024.65 540.35,850 553.78,836.57 658.43,836.57 700,795 P4.7@700,672.17
1_AD1_IN8: IC1.28 P4.8 | length 1623.4
  Top Layer w6: IC1.28@337.24,1717.99 v1(379,1718) ; v1(750,424) P4.8@750,495
  SIG03 w6: v1(379,1718) 345,1718 327,1700 327,847 v1(750,424)
1_AD1_IN9: IC1.29 P4.9 | length 1395.6
  Top Layer w6: IC1.29@337.24,1698.31 v1(433,1698.31) ; P4.9@800,672.17 v1(800,744)
  SIG03 w6: v1(433,1698.31) 444.03,1687.28 444.03,1654.84 407.5,1618.31 407.5,1287.5 420,1275 576,1275 800,1051 v1(800,744)
1_AD1_IN10: IC1.12 P4.10 | length 1783.8
  Top Layer w6: IC1.12@337.24,2032.95 378,2032.95 v1(379,2011) ; P4.10@850,495 v1(850,636)
  SIG05 w6: v1(379,2011) 510,1880 510,1437 498,1425 498,1277 630,1145 630,856 v1(850,636)
1_AD1_IN14: IC1.70 P4.11 | length 1020.8
  Top Layer w6: v1(900,601) P4.11@900,672.17 ; v1(1045,1415.75) 1065.12,1435.87 IC1.70@1065.12,1482.24
  SIG04 w6: v1(900,601) 1045,746 v1(1045,1415.75)
1_AD2_IN1: IC1.40 P4.12 | length 1398.2
  Top Layer w6: v1(474.57,1222) IC1.40@474.57,1482.24 ; v1(950,424) P4.12@950,495
  SIG03 w6: v1(474.57,1222) 597.47,1222 762.47,1057 762.47,611.53 v1(950,424)
1_AD2_IN2: IC1.41 P4.13 | length 1103.3
  Top Layer w6: v1(494,1524) 494.25,1523.75 IC1.41@494.25,1482.24 ; P4.13@1000,672.17 v1(1000,786)
  SIG03 w6: v1(494,1524) 494,1430.53 1000,924.53 v1(1000,786)
1_AD2_IN3: IC1.42 P4.14 | length 1273.1
  Top Layer w6: v1(513.94,1363) IC1.42@513.94,1482.24 ; P4.14@1050,495 v1(1050,639)
  SIG03 w6: v1(513.94,1363) 852.53,1024.4 852.53,727.47 941,639 v1(1050,639)
1_AD2_IN4: IC1.43 P4.15 | length 1214.3
  Top Layer w6: v1(533.62,1297) IC1.43@533.62,1482.24 ; v1(1100,602) P4.15@1100,672.17
  SIG05 w6: v1(533.62,1297) 872,958.62 872,780 1050,602 v1(1100,602)
1_AD2_IN5: IC1.44 P4.16 | length 1396.3
  Top Layer w6: v1(553.31,1402) IC1.44@553.31,1482.24 ; v1(1137.5,1087) 1155.03,1069.47 1155.03,596.03 1150,591 P4.16@1150,495
  SIG03 w6: v1(553.31,1402) 562.18,1393.13 594.61,1393.13 900.74,1087 v1(1137.5,1087)
1_AD2_IN11: IC1.45 P4.17 | length 1186.5
  Top Layer w6: v1(572.99,1408.85) IC1.45@572.99,1482.24 ; P4.17@1200,672.17 v1(1200,981)
  SIG05 w6: v1(572.99,1408.85) 688.85,1293 888,1293 v1(1200,981)
1_AD2_IN12: IC1.48 P4.18 | length 1428.6
  Top Layer w6: v1(632.05,1389) IC1.48@632.05,1482.24 ; v1(1240.5,1090) 1255.03,1075.48 1255.03,593 1250,587.97 P4.18@1250,495
  SIG03 w6: v1(632.05,1389) 840.05,1181 1149.5,1181 v1(1240.5,1090)
1_AD3_IN1: IC1.47 P4.19 | length 1245.6
  Top Layer w6: IC1.47@612.36,1482.24 v1(612.36,1524) ; P4.19@1300,672.17 v1(1300,951)
  SIG05 w6: v1(612.36,1524) 658.36,1478 773,1478 v1(1300,951)
1_AD3_IN2: IC1.60 P4.20 | length 1328.8
  Top Layer w6: v1(868.27,1265) IC1.60@868.27,1482.24 ; v1(1350,424) P4.20@1350,495
  SIG05 w6: v1(868.27,1265) 1150,983.27 1150,624 v1(1350,424)
1_AD3_IN3: IC1.66 P5.1 | length 1383
  Top Layer w6: P5.1@400,342.17 v1(400,414) ; v1(986.38,1422) IC1.66@986.38,1482.24
  Bottom Layer w6: v1(400,414) 635,649 635,926 718,1009 718,1153.62 v1(986.38,1422)
1_AD3_IN5: IC1.74 P5.2 | length 1743.1
  Top Layer w6: P5.2@450,165 v1(450,401) ; v1(1123,1562) 1141.2,1580.2 IC1.74@1182.76,1580.2
  Bottom Layer w6: v1(450,401) 753,704 753,951 857,1055 857,1159 1123,1425 v1(1123,1562)
1_AD3_IN6: IC1.59 P5.3 | length 1652.4
  Top Layer w6: v1(500,271) P5.3@500,342.17 ; IC1.59@848.58,1482.24 848.58,1523.58 v1(849,1524)
  SIG04 w6: v1(500,271) 518,289 518,1330 533,1345 533,1450 548,1465 790,1465 v1(849,1524)
1_AD3_IN7: IC1.79 P5.4 | length 2181.7
  Top Layer w6: v1(550,72) P5.4@550,165 ; IC1.79@1182.76,1678.62 1223.62,1678.62 v1(1224,1679)
  Bottom Layer w6: v1(550,72) 825,72 1180.5,427.5 1180.5,1635.5 v1(1224,1679)
1_AD3_IN8: IC1.80 P5.5 | length 1656.6
  Top Layer w6: P5.5@600,342.17 v1(600,429) ; v1(1099,1656) 1141.31,1698.31 IC1.80@1182.76,1698.31
  Bottom Layer w6: v1(600,429) 954.6,783.6 954.6,826.64 994,866.04 994,1045 1141,1192 1141,1614 v1(1099,1656)
1_AD3_IN9: IC1.81 P5.6 | length 1927.2
  Top Layer w6: P5.6@650,165 v1(650,251) ; IC1.81@1182.76,1717.99 v1(1224,1718)
  Bottom Layer w6: v1(650,251) 650,427 662.5,439.5 825,439.5 975,589.5 975,801 1159,985 1159,1189 1162.5,1192.5 1162.5,1656.5 v1(1224,1718)
1_AD3_IN10: IC1.82 P5.7 | length 2011
  Top Layer w6: v1(700,271) P5.7@700,342.17 ; IC1.82@1182.76,1737.68 v1(1297,1737.68)
  SIG04 w6: v1(700,271) 890.5,271 1219.63,600.13 1219.63,1107.87 1297,1185.25 v1(1297,1737.68)
1_AD3_IN11: IC1.85 P5.8 | length 2602.8
  Top Layer w6: v1(750,94) P5.8@750,165 ; v1(1121.73,1796.73) IC1.85@1182.76,1796.73
  Bottom Layer w6: v1(750,94) 434.5,94 375,153.5 375,918 387.5,930.5 590,930.5 647,987.5 647,1110 938,1401 938,1613 v1(1121.73,1796.73)
1_AD3_IN12: IC1.46 P5.9 | length 1309.9
  Top Layer w6: v1(592.68,1417.72) IC1.46@592.68,1482.24 ; P5.9@800,342.17 v1(800,414)
  SIG04 w6: v1(592.68,1417.72) 713.28,1417.72 816,1315 816,430 v1(800,414)
1_AD3_IN13: IC1.58 P5.10 | length 1506.6
  Top Layer w6: IC1.58@828.9,1482.24 828.9,1441 738,1350.1 738,1091 692,1045 692,928.36 759,861.36 759,598 788,569 788,429 767,408 763,408 762,407 762,245 775,232 849,232 850,231 P5.10@850,165
1_AD3_IN14: IC1.63 P5.11 | length 1295.3
  Top Layer w6: P5.11@900,342.17 900,560 962,622 962,812 1101,951 1101,1181 927.32,1354.68 IC1.63@927.32,1482.24
1_AD3_IN15: IC1.64 P5.12 | length 1522.6
  Top Layer w6: IC1.64@947.01,1482.24 947.01,1397 1119,1225.01 1119,757.03 1137.03,739 1137.03,604 1094,560.97 1094,437.5 1084.91,428.41 1046,428.41 1044.97,427.38 1044.97,264.97 995,215 950,215 P5.12@950,165
1_AD3_IN16: IC1.65 P5.13 | length 1483.5
  Top Layer w6: IC1.65@966.69,1482.24 v1(966.69,1540) ; P5.13@1000,342.17 v1(1000,553)
  SIG03 w6: v1(966.69,1540) 1258.5,1248.19 1258.5,1006.5 1114,862 1114,667 v1(1000,553)
1_AD4_IN1: IC1.67 P5.14 | length 1551.9
  Top Layer w6: IC1.67@1006.06,1482.24 1006.06,1375 1222.13,1158.94 1222.13,1074.63 1237.03,1059.72 1237.03,606 1188,556.97 1188,428 1169,409 1063.97,409 1062.97,408 1062.97,248.97 1050,236 P5.14@1050,165
1_AD4_IN2: IC1.68 P5.15 | length 1695.3
  Top Layer w6: IC1.68@1025.75,1482.24 1025.75,1381 1388,1018.75 1388,418 1375,405 1337,405 1333,409 1262.5,409 1250,396.5 1250,287.5 1237.5,275 1101,275 1100,276 P5.15@1100,342.17
1_AD4_IN3: IC1.73 P5.16 | length 1747.6
  Top Layer w6: P5.16@1150,165 1150,243.5 1162.5,256 1261,256 1275,242 1389,242 1406,259 1406,1199 1182,1423 1182,1560.51 IC1.73@1182.76,1560.51
1_AD4_IN4: IC1.75 P5.17 | length 1385.1
  Top Layer w6: IC1.75@1182.76,1599.88 1224,1599.88 1309.07,1514.81 1309.07,1497.52 v1(1316,1490.59) ; P5.17@1200,342.17 v1(1200,414)
  SIG03 w6: v1(1200,414) 1316,530 v1(1316,1490.59)
1_AD4_IN5: IC1.76 P5.18 | length 1938.5
  Top Layer w6: IC1.76@1182.76,1619.57 1259,1619.57 1327.07,1551.49 1327.07,1515.52 1424,1418.59 1424,87.5 1411.5,75 1262.5,75 1250,87.5 P5.18@1250,165
1_AD4_IN12: IC1.77 P5.19 | length 1566.7
  Top Layer w6: IC1.77@1182.76,1639.25 1223.75,1639.25 v1(1224,1639) ; v1(1300,271) P5.19@1300,342.17
  SIG03 w6: v1(1224,1639) 1335,1528 1335,1227 1366,1196 1366,337 v1(1300,271)
1_AD4_IN13: IC1.78 P5.20 | length 1844.3
  Top Layer w6: v1(1141,1659) 1141.06,1658.94 IC1.78@1182.76,1658.94 ; v1(1350,94) P5.20@1350,165
  SIG03 w6: v1(1141,1659) 1276.5,1523.5 1276.5,976 1180,879.5 1180,264 v1(1350,94)
1_BOOT0: IC1.138 IC2.138 IC3.138 IC4.138 IC5.138 R1.2 | length 5495.1
  Top Layer w6: IC1.138@533.62,2327.76 533.62,2368.62 v1(534,2369) ; IC2.138@1633.62,2327.76 v1(1633.62,2369.17) v1(1633.62,2397) ; IC3.138@2733.62,2327.76 v1(2733.62,2385) ; IC4.138@3833.62,2327.76 v1(3833.62,2385) v1(3833.62,2407) ; IC5.138@4933.62,2327.76 4933.62,2382 v1(4933.62,2407)
  SIG01 w6: v1(534,2369) 575,2328 1592.46,2328 v1(1633.62,2369.17) ; v1(1633.62,2397) 2721.62,2397 v1(2733.62,2385) v1(3833.62,2385) ; v1(3833.62,2407) 4467,2407 ; v1(3979.13,2894.87) 4467,2407 ; v1(4933.62,2407) 4467,2407
  Bottom Layer w6: v1(3979.13,2894.87) R1.2@3979.13,2935
1_NRST: C66.1 IC1.25 IC2.25 IC3.25 IC4.25 IC5.25 R2.1 S1.3 S1.4 | length 7609.6
  Top Layer w6: v1(296,1777) v1(296,1777) IC1.25@337.24,1777.05 ; v1(1315,1777.05) v1(1396,1777.05) IC2.25@1437.24,1777.05 ; v1(2495.83,1777.05) IC3.25@2537.24,1777.05 v1@2969.95,1777.05 ; v1(2974,1773) v1@2969.95,1777.05 ; v1(3267.05,1777.05) v1@2969.95,1777.05 ; v1(3567,1748) 3567,1748.21 v1(3595.83,1777.05) IC4.25@3637.24,1777.05 ; v1(4218,3164.53) C66.1@4330,3164.53 v1(4380.87,3164.53) ; v1(4688.5,1777.05) IC5.25@4737.24,1777.05
  SIG01 w6: v1(296,1777) 1167,1777 1183,1761 1298.95,1761 v1(1315,1777.05) ; v1(1396,1777.05) 1436.95,1818 2454.88,1818 v1(2495.83,1777.05) ; v1(2974,1773) 3357,1773 3382,1748 v1(3567,1748) ; v1(3595.83,1777.05) 3650.79,1832 4633.55,1832 v1(4688.5,1777.05) ; S1.3@3884.09,3495 S1.4@4140,3495
  SIG03 w6: S1.4@4140,3495 4218,3417 v1(4218,3164.53)
  Bottom Layer w6: v1(3267.05,1777.05) 4380.87,2890.87 R2.1@4380.87,2950 v1(4380.87,3164.53)
1_SPI_MISO: IC1.134 P1.3 | length 3436.1
  Top Layer w6: IC1.134@612.36,2327.76 v1(612.36,2369) ; v1(3405,3306) P1.3@3405,3495
  SIG04 w6: v1(612.36,2369) 612.36,2411.86 637.5,2437 1552,2437 2421,3306 v1(3405,3306)
1_SPI_MOSI: IC1.135 P1.5 | length 3969.9
  Top Layer w6: v1(592.68,2286) IC1.135@592.68,2327.76 ; v1(3305,2461) P1.5@3305,3495
  SIG04 w6: v1(592.68,2286) 724.68,2154 2998,2154 v1(3305,2461)
1_SPI_SCK: IC1.133 P1.1 | length 3445
  Top Layer w6: IC1.133@632.05,2327.76 v1(632.05,2408) ; v1(3505,3424) P1.1@3505,3495
  SIG01 w6: v1(632.05,2408) 1398.05,3174 2772,3174 2938,3340 3421,3340 v1(3505,3424)
1_SWCLK: IC1.109 IC2.109 IC3.109 IC4.109 IC5.109 P2.1 | length 6238.6
  Top Layer w6: IC1.109@1104.49,2327.76 1104.49,2286 v1(1124.49,2266) ; v1(2204,2266) 2204.49,2266.49 IC2.109@2204.49,2327.76 ; v1(3133,2266) 3284.14,2266 v1(3304.49,2286.35) IC3.109@3304.49,2327.76 ; IC4.109@4404.49,2327.76 4404.49,2286.49 v1(4404.49,2286.35) v1@4406.35,2284.48 ; v1(4560,2442) P2.1@4560,3501.42 ; v1(5504,2252) 5504.49,2252.49 IC5.109@5504.49,2327.76 ; v1(4388,2270) 4404.42,2286.42 v1(4388,2270)
  SIG01 w6: v1(1124.49,2266) 1519.82,2266 1527.35,2258.47 2196.47,2258.47 v1(2204,2266) v1(3133,2266) ; v1(3304.49,2286.35) 3320.83,2270 v1(4388,2270) ; v1(4404.49,2286.35) 4682.65,2286.35 4717,2252 v1(5504,2252)
  Bottom Layer w6: v1@4404,2286 v1(4560,2442) v1@4404.42,2286.42
1_SWDIO: IC1.105 IC2.105 IC3.105 IC4.105 IC5.105 P2.2 R3.2 | length 9643.9
  Top Layer w6: IC1.105@1182.76,2190.43 1223.57,2190.43 v1(1224,2190) ; v1(2179,2190.43) IC2.105@2282.76,2190.43 2323.57,2190.43 v1(2324,2190) ; IC3.105@3382.76,2190.43 v1(3424.17,2190.43) 3504,2190.43 v1(3504.13,2190.57) ; IC4.105@4482.76,2190.43 4556,2190.43 4575,2209.43 4575,2255.43 4510,2320.43 v1(4510,3307) P2.2@4510,3678.58 ; IC5.105@5582.76,2190.43 5621.43,2190.43 v1(5624,2193)
  SIG01 w6: v1(1224,2190) 2178.57,2190 v1(2179,2190.43) ; v1(3424.17,2190.43) 3423.73,2190 v1(2324,2190) 2346,2212 4497,2212 4516,2193 v1(5624,2193) v1(4510,3307)
  Bottom Layer w6: v1(3504.13,2190.57) R3.2@3504.13,2940
2_AD1_IN1: IC2.34 P6.1 | length 1093.2
  Top Layer w6: v1(1364,1547) 1364,1576.38 1387.5,1599.88 IC2.34@1437.24,1599.88 ; P6.1@1620,672.17 v1(1620,806)
  SIG03 w6: v1(1364,1547) 1364,1239 1506,1097 1506,920 v1(1620,806)
2_AD1_IN2: IC2.35 P6.2 | length 1239.8
  Top Layer w6: v1(1396,1580) 1396.2,1580.2 IC2.35@1437.24,1580.2 ; P6.2@1670,495 v1(1670,566)
  SIG05 w6: v1(1396,1580) 1396,840 v1(1670,566)
2_AD1_IN3: IC2.36 P6.3 | length 1008.3
  Top Layer w6: IC2.36@1437.24,1560.51 1442,1560.51 1442,1470.24 1538,1374.24 1538,1011 1720,829 P6.3@1720,672.17
2_AD1_IN4: IC2.37 P6.4 | length 1698.9
  Top Layer w6: IC2.37@1515.51,1482.24 1515.51,1523 1516.51,1524 v1(1530,1524) ; v1(1770,424) P6.4@1770,495
  SIG05 w6: v1(1530,1524) 1551,1503 1551,1337 2091,797 2091,562.5 2075.5,547 1893,547 v1(1770,424)
2_AD1_IN5: IC2.14 P6.5 | length 1560.9
  Top Layer w6: v1(1380,1993.58) IC2.14@1437.24,1993.58 ; P6.5@1820,672.17 v1(1820,744)
  SIG03 w6: v1(1380,1993.58) 1380,1570.82 1382.37,1568.45 1382.37,1259.63 1650.56,991.44 1650.56,913.44 v1(1820,744)
2_AD1_IN6: IC2.26 P6.6 | length 1465.9
  Top Layer w6: IC2.26@1437.24,1757.36 1478.64,1757.36 v1(1479,1757) ; P6.6@1870,495 v1(1870,566)
  SIG04 w6: v1(1479,1757) 1495,1741 1495,1201 1741,955 1741,695 v1(1870,566)
2_AD1_IN7: IC2.27 P6.7 | length 1721
  Top Layer w6: IC2.27@1437.24,1737.68 1387.5,1737.68 1345.59,1695.77 1345.59,1539.41 1458,1427 1458,900 1514,844 1650,844 1666,828 1666,625 1686,605 1919,605 1920,606 P6.7@1920,672.17
2_AD1_IN8: IC2.28 P6.8 | length 2024.9
  Top Layer w6: IC2.28@1437.24,1717.99 1625,1717.99 1642,1700.99 1642,1559 1625,1542 1498,1542 1497,1541 1497,1444.11 1703.11,1238 1912.5,1238 1925,1225.5 1925,968.5 1937.5,956 2039.5,956 2058,937.5 2058,606 2006.5,554.5 1970,554.5 P6.8@1970,495
2_AD1_IN9: IC2.29 P6.9 | length 1305.3
  Top Layer w6: IC2.29@1437.24,1698.31 1482,1698.31 v1(1611.31,1569) ; P6.9@2020,672.17 v1(2020,744)
  SIG03 w6: v1(1611.31,1569) 1611.31,1292.69 2034,870 2034,758 v1(2020,744)
2_AD1_IN10: IC2.12 P6.10 | length 1934
  Top Layer w6: IC2.12@1437.24,2032.95 v1(1479,2032.95) ; P6.10@2070,495 v1(2070,577.25)
  SIG05 w6: v1(1479,2032.95) 1463,2016.95 1463,1020 1905.75,577.25 v1(2070,577.25)
2_AD1_IN14: IC2.70 P6.11 | length 880.9
  Top Layer w6: P6.11@2120,672.17 2120,845 2228,953 2228,1319 2165.12,1381.88 IC2.70@2165.12,1482.24
2_AD2_IN1: IC2.40 P6.12 | length 1375.9
  Top Layer w6: v1(1574.57,1416) IC2.40@1574.57,1482.24 ; v1(2170,424) P6.12@2170,495
  SIG03 w6: v1(1574.57,1416) 1574.57,1301.43 1818,1058 1818,776 v1(2170,424)
2_AD2_IN2: IC2.41 P6.13 | length 1069.3
  Top Layer w6: v1(1594.25,1435) IC2.41@1594.25,1482.24 ; P6.13@2220,672.17 v1(2220,744)
  SIG05 w6: v1(1594.25,1435) 2220,809.25 v1(2220,744)
2_AD2_IN3: IC2.42 P6.14 | length 1330.2
  Top Layer w6: IC2.42@1613.94,1482.24 1613.94,1441 v1(1779.94,1275) ; P6.14@2270,495 v1(2270,639)
  SIG03 w6: v1(1779.94,1275) 1901.48,1275 2186.5,989.98 2186.5,722.5 v1(2270,639)
2_AD2_IN4: IC2.43 P6.15 | length 1448.4
  Top Layer w6: IC2.43@1633.62,1482.24 1633.62,1523.62 v1(1634,1524) ; v1(2320,596.54) P6.15@2320,672.17
  SIG03 w6: v1(1634,1524) 1634,1335 1730,1239 1874,1239 2063.75,1049.25 2063.75,793.25 2260.46,596.54 v1(2320,596.54)
2_AD2_IN5: IC2.44 P6.16 | length 1418.5
  Top Layer w6: v1(1653,1441) 1653.31,1441.31 IC2.44@1653.31,1482.24 ; P6.16@2370,495 v1(2370,619)
  SIG03 w6: v1(1653,1441) 1653,1366 1762,1257 1885,1257 2122,1020 2122,761 2264,619 v1(2370,619)
2_AD2_IN11: IC2.45 P6.17 | length 1348.3
  Top Layer w6: IC2.45@1672.99,1482.24 1672.99,1523 1673.99,1524 v1(1687,1524) ; P6.17@2420,672.17 v1(2420,1026)
  SIG05 w6: v1(1687,1524) 2012.43,1198.57 2247.43,1198.57 v1(2420,1026)
2_AD2_IN12: IC2.48 P6.18 | length 1292.9
  Top Layer w6: v1(1732.05,1440.95) IC2.48@1732.05,1482.24 ; P6.18@2470,495 v1(2470,703)
  SIG05 w6: v1(1732.05,1440.95) v1(2470,703)
2_AD3_IN1: IC2.47 P6.19 | length 1286.9
  Top Layer w6: v1(1712.36,1408.64) IC2.47@1712.36,1482.24 ; v1(2520,601) P6.19@2520,672.17
  SIG05 w6: v1(1712.36,1408.64) v1(2520,601)
2_AD3_IN2: IC2.60 P6.20 | length 1236.5
  Top Layer w6: v1(1968.27,1373) IC2.60@1968.27,1482.24 ; P6.20@2570,495 v1(2570,721.04)
  SIG03 w6: v1(1968.27,1373) 2268,1073.27 2268,1023.04 v1(2570,721.04)
2_AD3_IN3: IC2.66 P7.1 | length 1330.4
  Top Layer w6: P7.1@1620,345 v1(1620,463) ; v1(2086.38,1352) IC2.66@2086.38,1482.24
  Bottom Layer w6: v1(1620,463) 1792,635 1792,899 1878,985 1878,1143.62 v1(2086.38,1352)
2_AD3_IN5: IC2.74 P7.2 | length 1720.7
  Top Layer w6: P7.2@1670,167.83 v1(1670,239) ; v1(2189.6,1580.2) IC2.74@2282.76,1580.2
  Bottom Layer w6: v1(1670,239) 1670,482 1924,736 1924,1081.84 2108,1265.84 2108,1498.6 v1(2189.6,1580.2)
2_AD3_IN6: IC2.59 P7.3 | length 1602.8
  Top Layer w6: v1(1720,259) P7.3@1720,345 ; v1(1948.58,1346.58) IC2.59@1948.58,1482.24
  Bottom Layer w6: v1(1720,259) 1669,210 1599,280 1599,997 v1(1948.58,1346.58)
2_AD3_IN7: IC2.79 P7.4 | length 1781.5
  Top Layer w6: P7.4@1770,167.83 v1(1770,321) ; IC2.79@2282.76,1678.62 v1(2324,1678.62)
  Bottom Layer w6: v1(1770,321) 2136,687 2136,1086 2276.97,1226.97 2276.97,1631.59 v1(2324,1678.62)
2_AD3_IN8: IC2.80 P7.5 | length 1583.3
  Top Layer w6: P7.5@1820,345 v1(1820,416) ; v1(2241.17,1698.31) IC2.80@2282.76,1698.31
  Bottom Layer w6: v1(1820,416) 1970,566 1970,887 2064,981 2064,1133.52 2255,1324.52 2255,1613.2 2258,1616.2 2258,1681.48 v1(2241.17,1698.31)
2_AD3_IN9: IC2.81 P7.6 | length 1985.8
  Top Layer w6: P7.6@1870,167.83 v1(1870,277) ; v1(2175,1717.99) IC2.81@2282.76,1717.99
  Bottom Layer w6: v1(1870,277) 1780.5,277 1745,312.5 1745,366.46 1947,568.46 1947,900 2046,999 2046,1155.25 2230,1339.25 2230,1599 2175,1654 v1(2175,1717.99)
2_AD3_IN10: IC2.82 P7.7 | length 1823.6
  Top Layer w6: v1(1920,274) P7.7@1920,345 ; IC2.82@2282.76,1737.68 2342.32,1737.68 v1(2373,1707)
  Bottom Layer w6: v1(1920,274) 1920,337 2177,594 2177,1087.5 2298,1208.5 2298,1612 2306,1620 2355.5,1620 2373,1637.5 v1(2373,1707)
2_AD3_IN11: IC2.85 P7.8 | length 1965.7
  Top Layer w6: P7.8@1970,167.83 1970,218 2015,218 2065,268 2065,389.5 2108,432.5 2108,552 2159,603 2159,848 2254,943 2254,1525.5 2237.5,1542 2175,1542 2156,1561 2156,1777.73 2175,1796.73 IC2.85@2282.76,1796.73
2_AD3_IN12: IC2.46 P7.9 | length 1272.8
  Top Layer w6: IC2.46@1692.68,1482.24 1692.68,1441.32 v1(1693,1441) ; P7.9@2020,345 v1(2020,512)
  SIG04 w6: v1(1693,1441) 1693,1257 1768,1182 1768,764 v1(2020,512)
2_AD3_IN13: IC2.58 P7.10 | length 1728.3
  Top Layer w6: IC2.58@1928.9,1482.24 1928.9,1441.1 v1(1929,1441) ; P7.10@2070,167.83 v1(2070,239)
  SIG03 w6: v1(1929,1441) 1929,1287.98 2174.37,1042.61 2209.46,1042.61 2228.86,1023.21 2228.86,793.14 2395,627 2395,452 2182,239 v1(2070,239)
2_AD3_IN14: IC2.63 P7.11 | length 1317.6
  Top Layer w6: v1(2027.32,1366.32) IC2.63@2027.32,1482.24 ; v1(2120,274) P7.11@2120,345
  SIG04 w6: v1(2027.32,1366.32) 2120,1273.64 v1(2120,274)
2_AD3_IN15: IC2.64 P7.12 | length 1726.7
  Top Layer w6: v1(2047.01,1240.99) IC2.64@2047.01,1482.24 ; v1(2170,96) P7.12@2170,167.83
  SIG03 w6: v1(2047.01,1240.99) 2047.01,1213 2197,1063.01 2224.99,1063.01 2248,1040 2248,830 2413,665 2413,438 2170,195 v1(2170,96)
2_AD3_IN16: IC2.65 P7.13 | length 1305
  Top Layer w6: IC2.65@2066.69,1482.24 2066.69,1523.69 v1(2067,1524) ; P7.13@2220,345 v1(2220,419)
  SIG04 w6: v1(2067,1524) 2245,1346 2245,444 v1(2220,419)
2_AD4_IN1: IC2.67 P7.14 | length 1833.7
  Top Layer w6: IC2.67@2106.06,1482.24 v1(2106.06,1524) ; P7.14@2270,167.83 v1(2270,253)
  SIG03 w6: v1(2106.06,1524) 2106.06,1396.94 2596,907 2596,412 2437,253 v1(2270,253)
2_AD4_IN2: IC2.68 P7.15 | length 1217.7
  Top Layer w6: v1(2125.75,1350) IC2.68@2125.75,1482.24 ; P7.15@2320,345 v1(2320,559)
  SIG01 w6: v1(2125.75,1350) 2125.75,753.25 v1(2320,559)
2_AD4_IN3: IC2.73 P7.16 | length 1704.3
  Top Layer w6: IC2.73@2282.76,1560.51 v1(2324,1560.51) ; v1(2370,96) P7.16@2370,167.83
  Bottom Layer w6: v1(2324,1560.51) 2324,716 2194,586 2194,272 v1(2370,96)
2_AD4_IN4: IC2.75 P7.17 | length 1351.7
  Top Layer w6: IC2.75@2282.76,1599.88 v1(2351,1599.88) ; P7.17@2420,345 v1(2420,416)
  Bottom Layer w6: v1(2351,1599.88) 2351,485 v1(2420,416)
2_AD4_IN5: IC2.76 P7.18 | length 1777.5
  Top Layer w6: IC2.76@2282.76,1619.57 2400,1619.57 2413,1606.57 2413,1462 2487,1388 2487,981 2608,860 2608,262.5 2583,237.5 2471,237.5 P7.18@2470,167.83
2_AD4_IN12: IC2.77 P7.19 | length 1662.1
  Top Layer w6: IC2.77@2282.76,1639.25 2323.75,1639.25 v1(2324,1639) ; v1(2520,274) P7.19@2520,345
  SIG03 w6: v1(2324,1639) 2324,1598 2400,1522 2400,1173 2645,928 2645,399 v1(2520,274)
2_AD4_IN13: IC2.78 P7.20 | length 1910.6
  Top Layer w6: v1(2241,1659) 2241.06,1658.94 IC2.78@2282.76,1658.94 ; v1(2570,96) P7.20@2570,167.83
  SIG03 w6: v1(2241,1659) 2241,1297 2620,918 2620,406 2502,288 2502,164 v1(2570,96)
2_SPI_MISO: IC2.134 P1.11 | length 1900.7
  Top Layer w6: IC2.134@1712.36,2327.76 v1(1712.36,2369) ; P1.11@3005,3495 v1(3005,3566)
  Bottom Layer w6: v1(1712.36,2369) 2383.36,3040 2423,3040 2949,3566 v1(3005,3566)
2_SPI_MOSI: IC2.135 P1.13 | length 1908.3
  Top Layer w6: v1(1692.68,2286) IC2.135@1692.68,2327.76 ; v1(2905,3233) P1.13@2905,3495
  Bottom Layer w6: v1(1692.68,2286) 1759.68,2353 2025,2353 v1(2905,3233)
2_SPI_SCK: IC2.133 P1.9 | length 2182.4
  Top Layer w6: IC2.133@1732.05,2327.76 1732.05,2286 v1(1913.52,2104.52) ; v1(3105,3424) P1.9@3105,3495
  Bottom Layer w6: v1(1913.52,2104.52) 3105,3296 v1(3105,3424)
3.3V: C11.1 C12.1 C13.1 C14.1 C15.1 C16.1 C17.1 C18.1 C19.1 C20.1 C21.1 C22.1 C23.1 C24.1 C25.1 C26.1 C27.1 C28.1 C29.1 C30.1 C31.1 C32.1 C33.1 C34.1 C35.1 C36.1 C37.1 C38.1 C39.1 C40.1 C41.1 C42.1 C43.1 C44.1 C45.1 C46.1 C47.1 C48.1 C49.1 C50.1 C51.1 C52.1 C53.1 C54.1 C55.1 C56.1 C57.1 C58.1 C59.1 C60.1 C61.1 C62.1 C63.1 C64.1 C65.1 C69.2 C70.2 IC1.17 IC1.32 IC1.33 IC1.39 IC1.52 IC1.62 IC1.72 IC1.84 IC1.95 IC1.108 IC1.121 IC1.131 IC1.144 IC2.17 IC2.32 IC2.33 IC2.39 IC2.52 IC2.62 IC2.72 IC2.84 IC2.95 IC2.108 IC2.121 IC2.131 IC2.144 IC3.17 IC3.32 IC3.33 IC3.39 IC3.52 IC3.62 IC3.72 IC3.84 IC3.95 IC3.108 IC3.121 IC3.131 IC3.144 IC4.17 IC4.32 IC4.33 IC4.39 IC4.52 IC4.62 IC4.72 IC4.84 IC4.95 IC4.108 IC4.121 IC4.131 IC4.144 IC5.17 IC5.32 IC5.33 IC5.39 IC5.52 IC5.62 IC5.72 IC5.84 IC5.95 IC5.108 IC5.121 IC5.131 IC5.144 P2.3 PS1.6 R2.2 R3.1 | length 5274.1
  Top Layer w6: v1(295.83,1639.25) IC1.32@337.24,1639.25 314,1639.25 314,1619.57 IC1.33@337.24,1619.57 377.22,1619.57 378.65,1621 378.65,1643.22 380,1644.57 v1(391.15,1644.57) ; IC1.17@337.24,1934.53 v1(378.65,1934.53) ; IC1.144@415.51,2327.76 v1(415.51,2369.17) ; IC1.39@454.88,1482.24 v1(454.88,1523.65) ; v1(671.42,2286.35) IC1.131@671.42,2327.76 ; v1(710.79,1440.83) IC1.52@710.79,1482.24 ; v1(868.27,2286.35) IC1.121@868.27,2327.76 ; v1(907.64,1440.83) IC1.62@907.64,1482.24 ; v1(1104.49,1440.83) IC1.72@1104.49,1482.24 ; v1(1141.35,1993.58) IC1.95@1182.76,1993.58 ; IC1.84@1182.76,1777.05 v1(1224.17,1777.05) ; IC1.108@1182.76,2249.49 v1(1224.17,2249.49) ; v1(1395.83,1639.25) IC2.32@1437.24,1639.25 1414,1639.25 1414,1619.57 IC2.33@1437.24,1619.57 1466.15,1619.57 v1(1478.65,1607.07) ; IC2.17@1437.24,1934.53 v1(1478.65,1934.53) ; v1(1447.51,2894.58) C69.2@1502.8,2894.58 ; v1(1503.01,2369.17) 1514.35,2369.17 1515.51,2368 IC2.144@1515.51,2327.76 ; IC2.39@1554.88,1482.24 1554.88,1522.54 1556,1523.65 v1(1567.38,1523.65) ; C70.2@1700,2895.5 C70.2@1700.91,2894.58 ; v1(1771.42,2286.35) IC2.131@1771.42,2327.76 ; v1(1810.79,1440.83) IC2.52@1810.79,1482.24 ; v1(1968.27,2286.35) IC2.121@1968.27,2327.76 ; v1(2007.64,1440.83) IC2.62@2007.64,1482.24 ; v1(2204.49,1440.83) IC2.72@2204.49,1482.24 ; v1(2241.35,1993.58) IC2.95@2282.76,1993.58 ; IC2.84@2282.76,1777.05 v1(2324.17,1777.05) ; IC2.108@2282.76,2249.49 v1(2336.67,2249.49) ; v1(2495.83,1639.25) IC3.32@2537.24,1639.25 2514,1639.25 2514,1619.57 IC3.33@2537.24,1619.57 2577.09,1619.57 2578.65,1618 v1(2578.65,1594.57) ; IC3.17@2537.24,1934.53 v1(2578.65,1934.53) ; IC3.144@2615.51,2327.76 v1(2615.51,2369.17) ; IC3.39@2654.88,1482.24 v1(2654.88,1523.65) ; v1(2871.42,2286.35) IC3.131@2871.42,2327.76 ; v1(2910.79,1440.83) IC3.52@2910.79,1482.24 ; v1(3068.27,2286.35) IC3.121@3068.27,2327.76 ; v1(3107.64,1440.83) IC3.62@3107.64,1482.24 ; v1(3304.49,1440.83) IC3.72@3304.49,1482.24 ; v1(3341.35,1993.58) IC3.95@3382.76,1993.58 ; IC3.84@3382.76,1777.05 v1(3424.17,1777.05) ; IC3.108@3382.76,2249.49 v1(3424.17,2249.49) ; v1(3595.83,1639.25) IC4.32@3637.24,1639.25 3614,1639.25 3614,1619.57 IC4.33@3637.24,1619.57 v1(3678.65,1619.57) ; IC4.17@3637.24,1934.53 v1(3678.65,1934.53) ; IC4.144@3715.51,2327.76 v1(3715.51,2369.17) ; IC4.39@3754.88,1482.24 v1(3754.88,1523.65) ; v1(3971.42,2286.35) IC4.131@3971.42,2327.76 ; v1(4010.79,1440.83) IC4.52@4010.79,1482.24 ; v1(4168.27,2286.35) IC4.121@4168.27,2327.76 ; v1(4207.64,1440.83) IC4.62@4207.64,1482.24 ; v1(4404.49,1428.33) IC4.72@4404.49,1482.24 ; v1(4441.35,1993.58) IC4.95@4482.76,1993.58 ; v1(4460,3429.99) P2.3@4460,3501.42 ; IC4.84@4482.76,1777.05 4523.12,1777.05 4524.17,1776 v1(4524.17,1764.55) ; IC4.108@4482.76,2249.49 v1(4524.17,2249.49) ; v1(4695.83,1639.25) IC5.32@4737.24,1639.25 4714,1639.25 4714,1619.57 IC5.33@4737.24,1619.57 v1(4778.65,1619.57) ; IC5.17@4737.24,1934.53 v1(4778.65,1934.53) ; IC5.144@4815.51,2327.76 v1(4815.51,2369.17) ; IC5.39@4854.88,1482.24 v1(4854.88,1523.65) ; v1(5071.42,2286.35) IC5.131@5071.42,2327.76 ; v1(5110.79,1440.83) IC5.52@5110.79,1482.24 ; v1(5268.27,2286.35) IC5.121@5268.27,2327.76 ; v1(5307.64,1440.83) IC5.62@5307.64,1482.24 ; v1(5504.49,1440.83) IC5.72@5504.49,1482.24 ; v1(5541.35,1993.58) IC5.95@5582.76,1993.58 ; IC5.84@5582.76,1777.05 5619.99,1777.05 v1(5624.17,1772.87) ; IC5.108@5582.76,2249.49 v1(5624.17,2249.49)
  Top Layer w30: v1(1447.51,2894.58) C69.2@1502.8,2894.58 ; C70.2@1700,2895.5 v1(1700,2930)
  Bottom Layer w6: v1(293.44,1009.82) C15.1@321.56,1009.82 ; v1(301.88,770) 301.88,794 302.88,795 C20.1@330,795 ; v1(441.55,1009.82) C16.1@469.68,1009.82 ; v1(485.63,794.46) C17.1@513.75,794.46 ; v1(589.67,1009.82) C14.1@617.79,1009.82 ; v1(656.88,794.46) C18.1@697.5,794.46 ; v1(737.79,1009.82) C12.1@765.91,1009.82 ; v1(885.91,997.32) 885.91,1008.73 887,1009.82 C13.1@914.03,1009.82 ; C11.1@895,840 v1(923.12,840) ; v1(1026.88,1005) C19.1@1055,1005 ; C21.1@1070,845 v1(1098.12,845) ; v1(1281.88,805) C27.1@1310,805 ; v1(1291.88,1037.5) 1291.88,1026 1292.88,1025 C22.1@1320,1025 ; v1(1465.88,805) C28.1@1494,805 ; v1(1521.88,1025) C23.1@1550,1025 ; v1(1649.88,805) C29.1@1678,805 ; v1(1751.88,1025) C24.1@1780,1025 ; v1(1833.88,805) C30.1@1862,805 ; v1(1981.88,1025) C25.1@2010,1025 ; v1(2017.88,805.47) C32.1@2046,805.47 ; v1(2201.88,805) C31.1@2230,805 ; v1(2211.88,1000) 2211.88,1024 2212.88,1025 C26.1@2240,1025 ; v1(2556.88,789.53) C39.1@2585,789.53 ; v1(2556.88,1084.53) C33.1@2585,1084.53 ; v1(2671.88,1084.53) C34.1@2775,1084.53 ; v1(2715.88,789.53) C40.1@2744,789.53 ; v1(2874.88,789.53) C41.1@2903,789.53 ; v1(2936.88,1084.53) C35.1@2965,1084.53 ; v1(3033.88,789.53) C42.1@3062,789.53 v1@3036.53,789.53 ; v1(3126.88,1084.53) C36.1@3155,1084.53 ; v1(3192.88,789.53) C38.1@3221,789.53 ; v1(3316.88,1084.53) C37.1@3345,1084.53 ; v1(3339.38,814.53) 3339.38,803.15 3353,789.53 C43.1@3380,789.53 ; v1(3575,2900.07) R3.1@3575,2940 ; v1(3701.88,1060) C45.1@3730,1060 ; v1(3703.88,789.53) C50.1@3732,789.53 ; v1(3886.88,1060) C44.1@3915,1060 ; v1(3920.88,789.53) C51.1@3949,789.53 ; v1(4071.88,1060) C46.1@4100,1060 ; v1(4137.88,777.03) 4137.88,788.41 4139,789.53 C52.1@4166,789.53 ; v1(4256.88,1060) C47.1@4285,1060 ; v1(4310,2910.07) R2.2@4310,2950 ; v1(4354.88,789.53) C53.1@4383,789.53 ; v1(4441.88,1060) C48.1@4470,1060 ; v1(4571.88,764.53) 4571.88,788.41 4573,789.53 C54.1@4600,789.53 C54.1@4600,793 ; v1(4626.88,1060) C49.1@4655,1060 ; v1(4801.88,1055) C55.1@4830,1055 ; v1(4906.88,780) C61.1@4935,780 ; v1(4967.88,1055) C56.1@4996,1055 ; v1(5049.38,780) C62.1@5102.5,780 ; v1(5133.88,1055) C57.1@5162,1055 ; v1(5241.88,780) C63.1@5270,780 ; v1(5299.88,1049.53) C59.1@5328,1049.53 ; v1(5409.38,769.53) C65.1@5437.5,769.53 ; v1(5465.88,1055) C58.1@5494,1055 ; v1(5576.88,780) C64.1@5605,780 ; v1(5631.88,1049.53) C60.1@5660,1049.53
  other v2: 5508,644 3852,661 1498,662 5299,709 150,898 3561,1024 5072,1024 5578,1024 150,1137 4188,3021 3554,3048
3_AD1_IN1: IC3.34 P8.1 | length 1149.2
  Top Layer w6: v1(2455.12,1566.88) 2488.12,1599.88 IC3.34@2537.24,1599.88 ; P8.1@2845,675 v1(2845,768)
  SIG05 w6: v1(2455.12,1566.88) 2455.12,1157.88 v1(2845,768)
3_AD1_IN2: IC3.35 P8.2 | length 1423.8
  Top Layer w6: v1(2496,1580.2) IC3.35@2537.24,1580.2 ; P8.2@2895,497.83 v1(2895,587)
  SIG05 w6: v1(2496,1580.2) 2479.2,1597 2425,1597 2412,1584 2412,1070 v1(2895,587)
3_AD1_IN3: IC3.36 P8.3 | length 1343.9
  Top Layer w6: IC3.36@2537.24,1560.51 v1(2579,1560.51) ; P8.3@2945,675 2945,605 2946,604 v1(2958,604)
  SIG05 w6: v1(2579,1560.51) 2579,1348.05 3085,842.05 3085,731 v1(2958,604)
3_AD1_IN4: IC3.37 P8.4 | length 1302.7
  Top Layer w6: IC3.37@2615.51,1482.24 2615.51,945.49 2675,886 2950,886 2995,841 P8.4@2995,497.83
3_AD1_IN5: IC3.14 P8.5 | length 1620.8
  Top Layer w6: IC3.14@2537.24,1993.58 2578,1993.58 2579,1992.58 v1(2579,1969) ; P8.5@3045,675 v1(3045,746)
  SIG05 w6: v1(2579,1969) 2542,1932 2542,1185.15 2658,1069.15 2679.85,1069.15 3003,746 v1(3045,746)
3_AD1_IN6: IC3.26 P8.6 | length 1689
  Top Layer w6: v1(2431,1757.36) IC3.26@2537.24,1757.36 ; P8.6@3095,497.83 v1(3095,569)
  SIG03 w6: v1(2431,1757.36) 2431,1243.69 2656.5,1018.19 2738.81,1018.19 3095,662 v1(3095,569)
3_AD1_IN7: IC3.27 P8.7 | length 1395.4
  Top Layer w6: v1(2480,1737.68) IC3.27@2537.24,1737.68 ; P8.7@3145,675 v1(3145,900)
  SIG03 w6: v1(2480,1737.68) 2480,1565 v1(3145,900)
3_AD1_IN8: IC3.28 P8.8 | length 1532.8
  Top Layer w6: IC3.28@2537.24,1717.99 v1(2579,1717.99) ; v1(3189.97,751) 3189.97,595.47 3195,590.44 P8.8@3195,497.83
  SIG03 w6: v1(2579,1717.99) 2579,1693.52 2700.63,1571.89 2700.63,1451.82 2998.78,1153.67 2998.78,1123.22 3209,913 3209,770.03 v1(3189.97,751)
3_AD1_IN9: IC3.29 P8.9 | length 1435.6
  Top Layer w6: IC3.29@2537.24,1698.31 v1(2740.69,1698.31) ; P8.9@3245,675 v1(3245,932.5)
  SIG03 w6: v1(2740.69,1698.31) 3245,1194 v1(3245,932.5)
3_AD1_IN10: IC3.12 P8.10 | length 1983.4
  Top Layer w6: IC3.12@2537.24,2032.95 v1(2640,2032.95) ; P8.10@3295,497.83 v1(3295,778.5)
  SIG03 w6: v1(2640,2032.95) 2640,1703.27 2770.85,1572.42 2770.85,1460.15 2819.59,1411.41 2946.28,1411.41 3227,1130.69 3227,846.5 v1(3295,778.5)
3_AD1_IN14: IC3.70 P8.11 | length 853.1
  Top Layer w6: IC3.70@3265.12,1482.24 3265.12,1294 3360.43,1198.68 3360.43,800 3345,784.57 P8.11@3345,675
3_AD2_IN1: IC3.40 P8.12 | length 1449.9
  Top Layer w6: v1(2674.57,1397.5) IC3.40@2674.57,1482.24 ; v1(3395,426) P8.12@3395,497.83
  SIG03 w6: v1(2674.57,1397.5) 2714.5,1397.5 2953,1159 2953,1128 3167.13,913.87 3167.13,653.87 v1(3395,426)